# Altium PCB RcMPPT-BMS.PcbDoc (part 1 of 2)
Units mm, origin at the board's own origin, x right, y up, seen from the top; angles counter-clockwise.
Board outline 99.06 x 55.88 mm, 4 copper layers (Top Layer, Mid Layer 1, Mid Layer 2, Bottom Layer), stack 1.587 mm thick; 194 components, 140 nets, 605 pads, 158 vias.
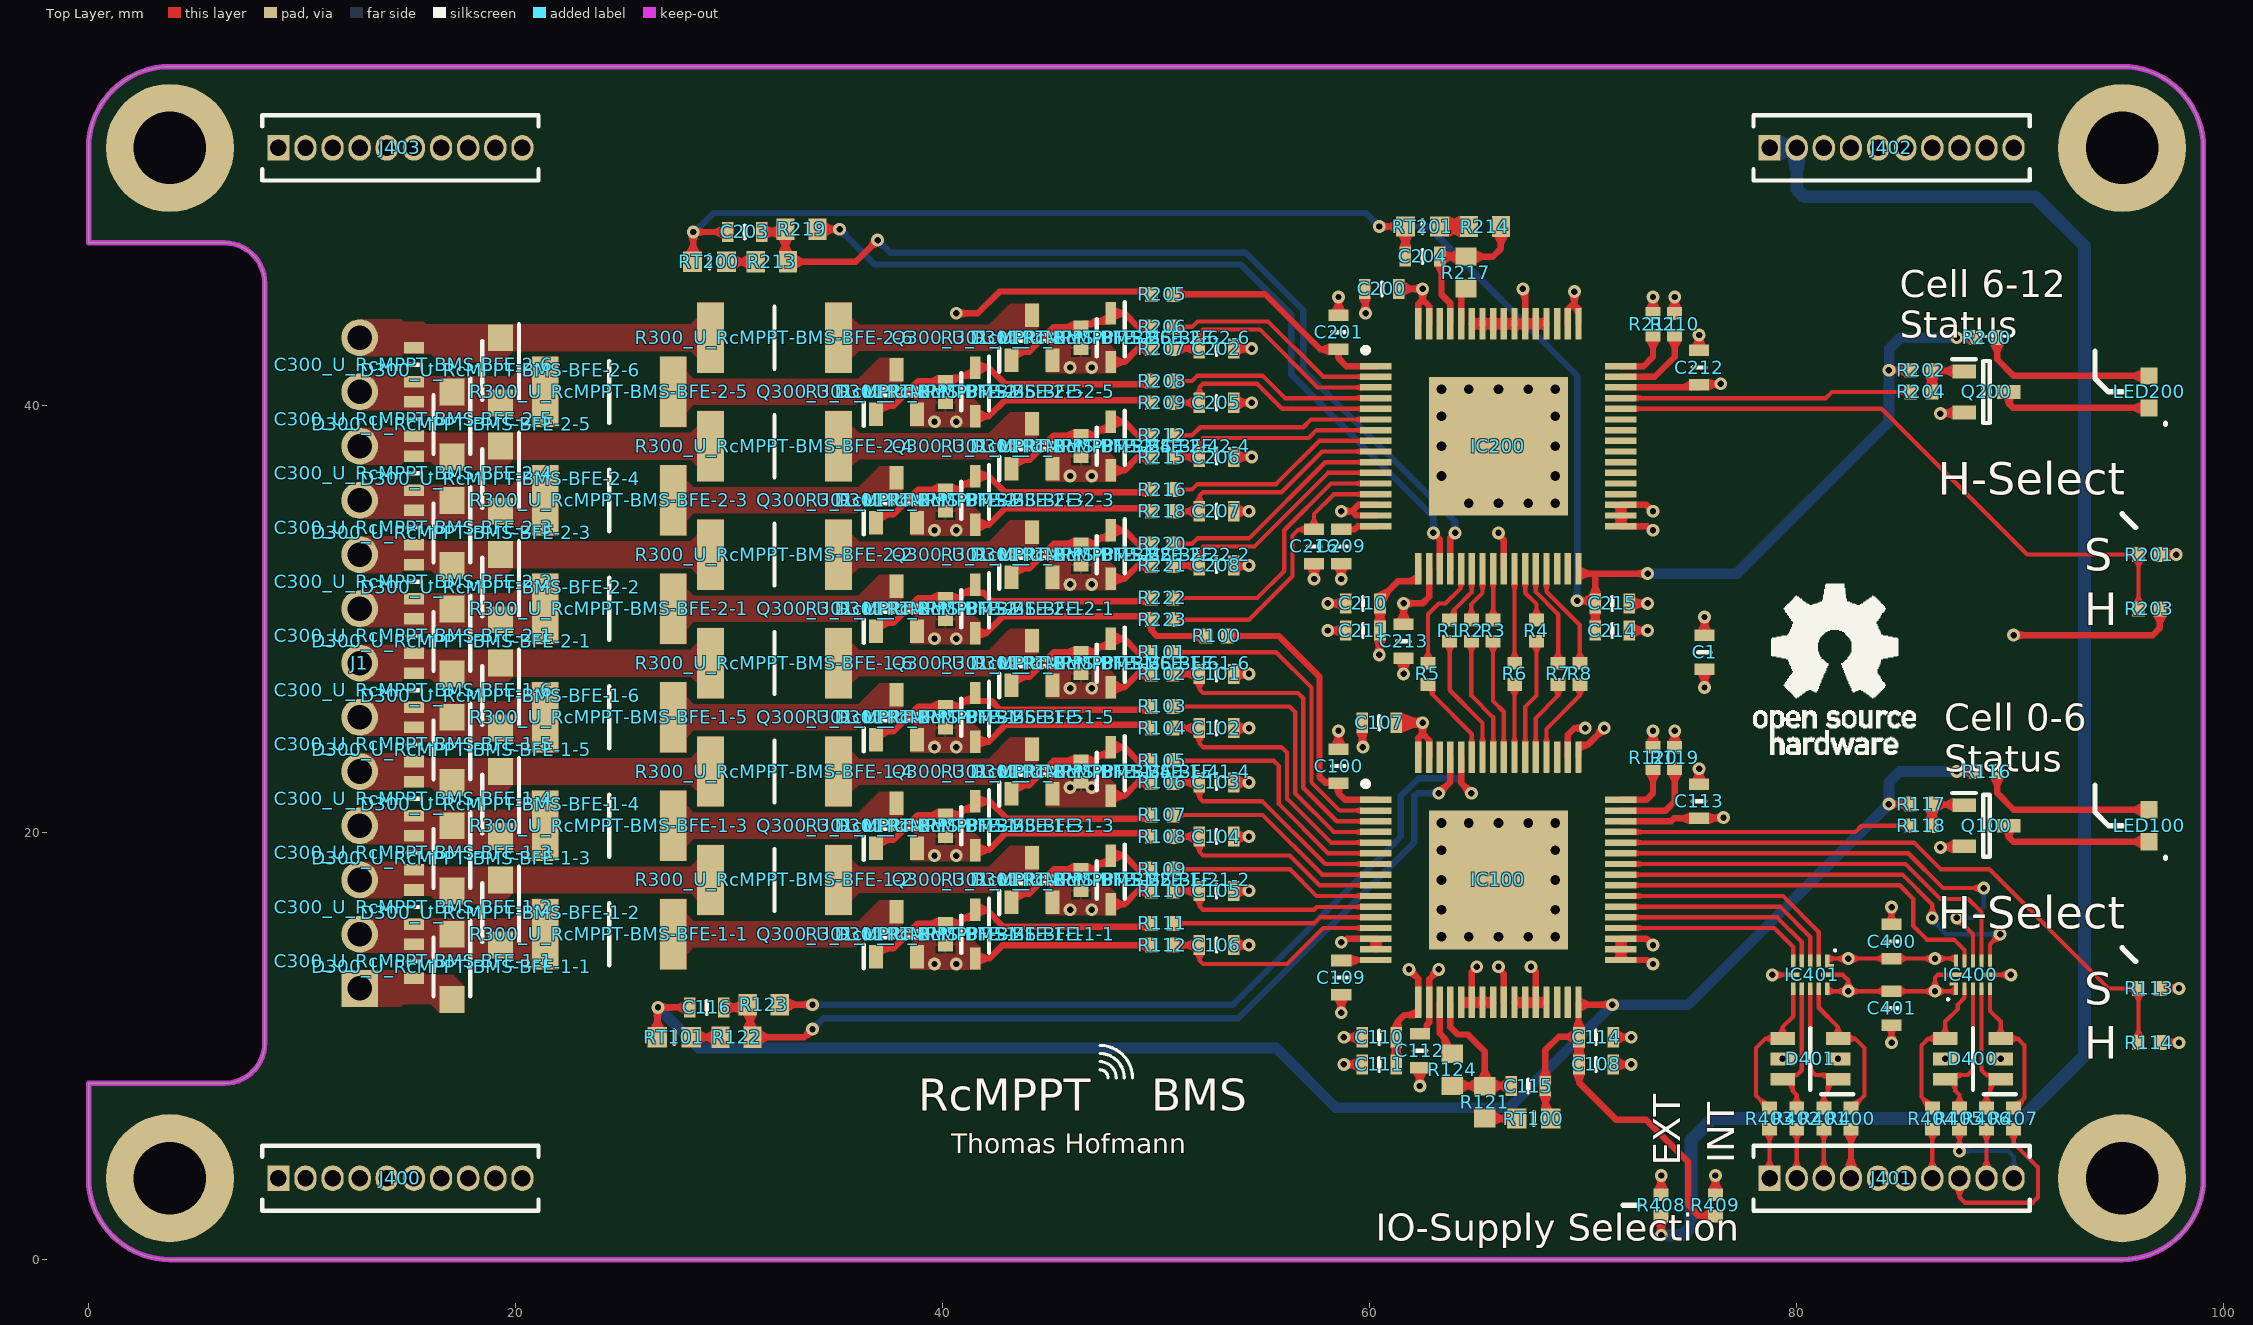
[diagram p0: Top Layer view]
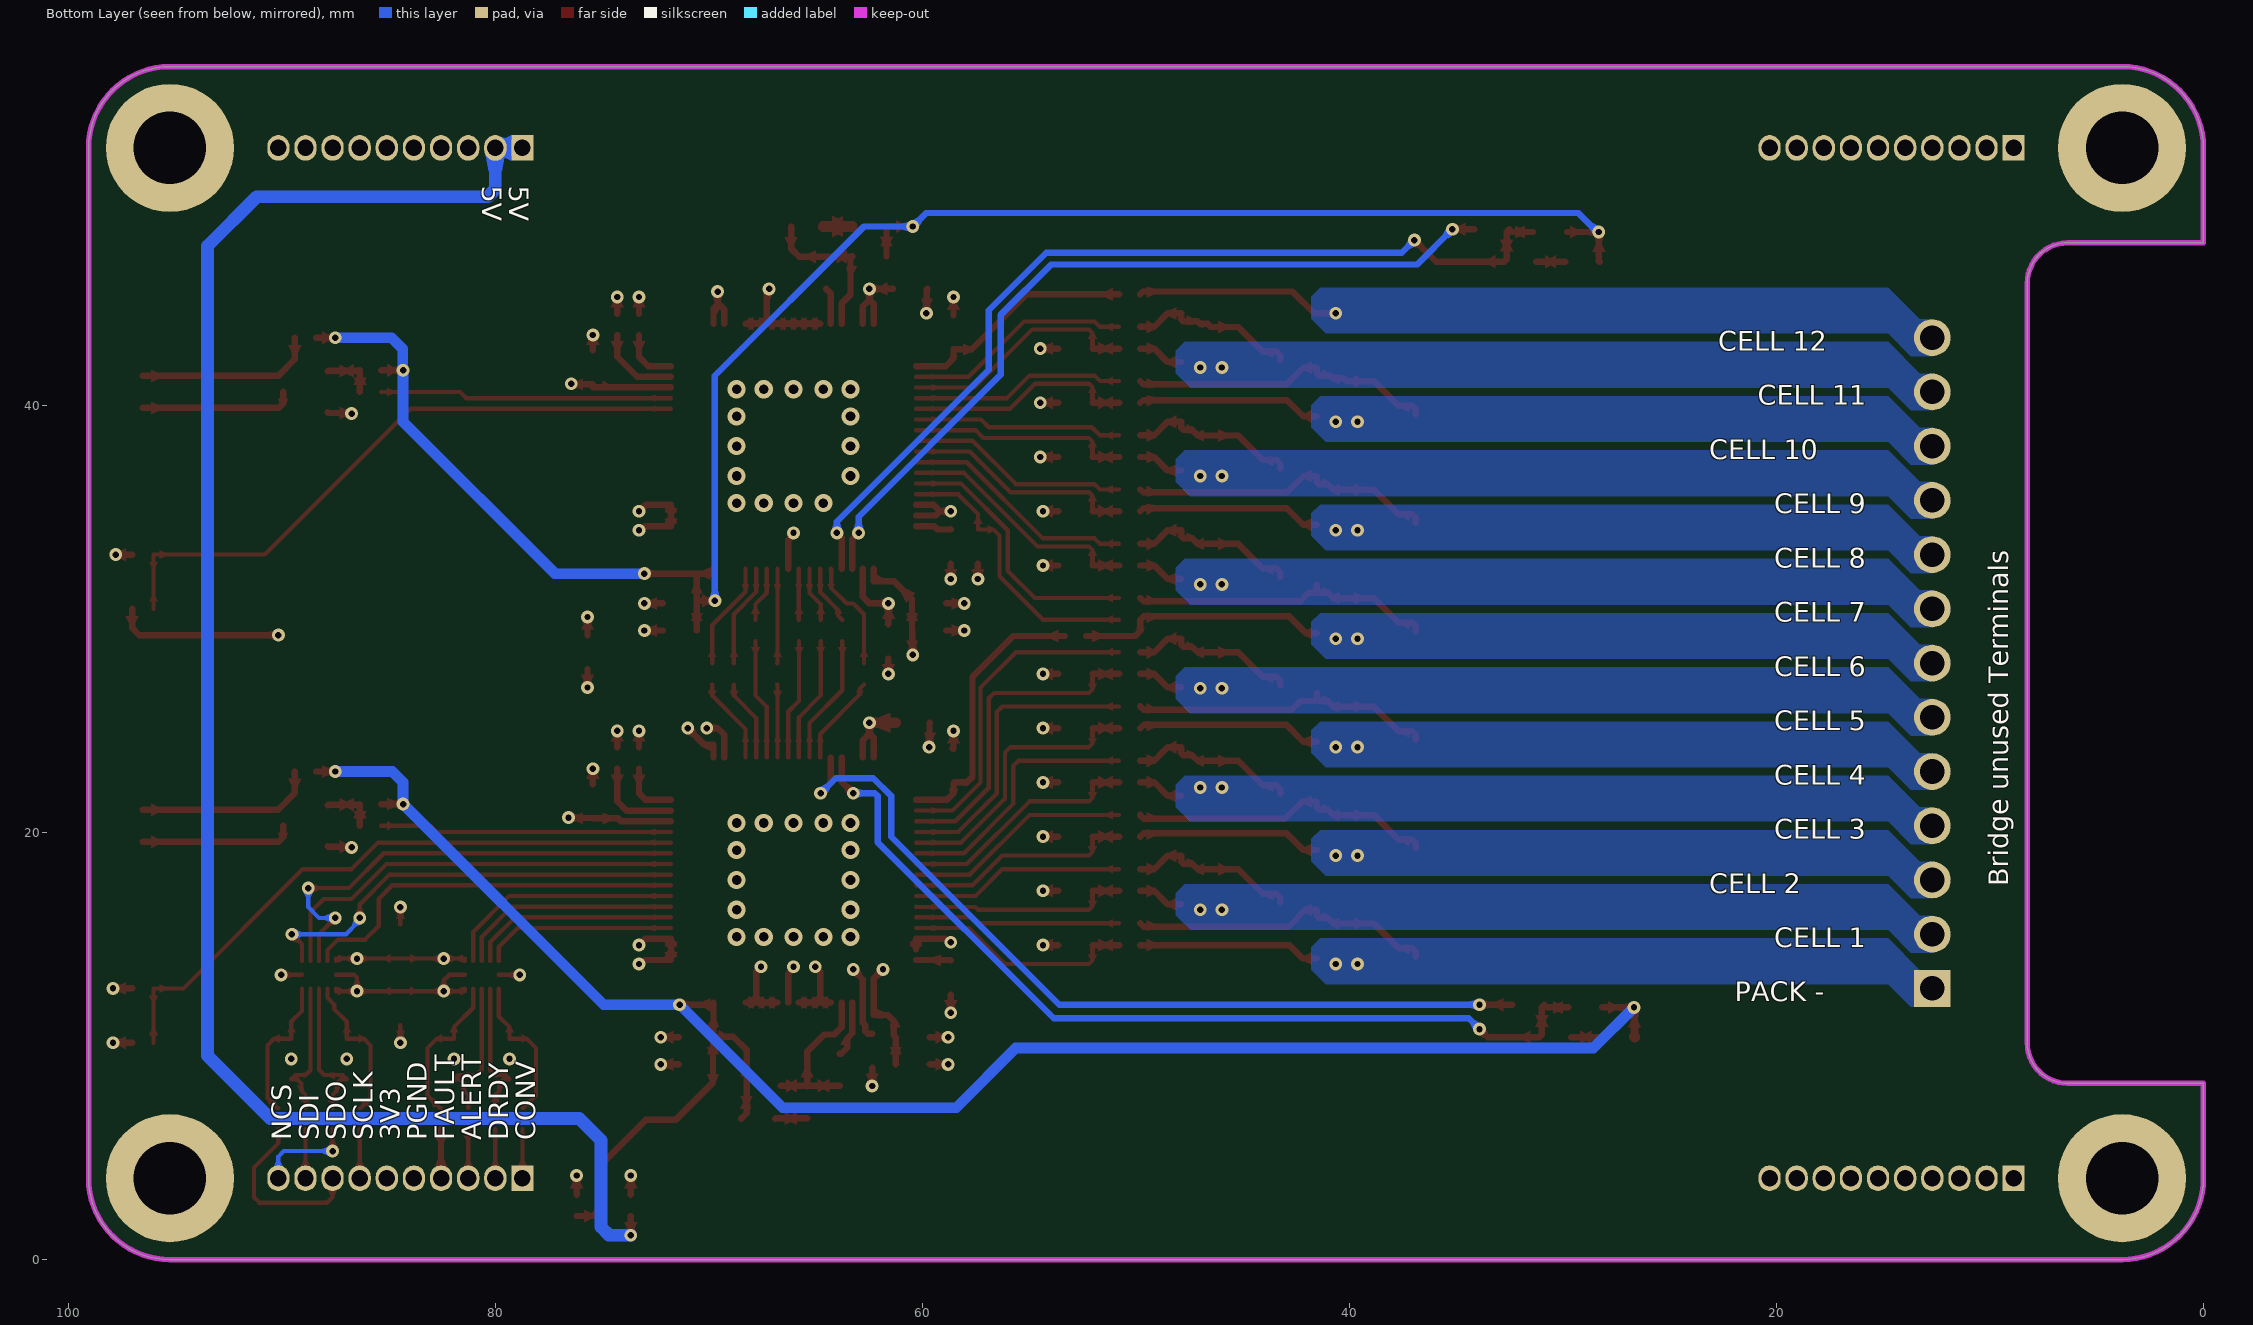
[diagram p1: Bottom Layer view, seen from below]
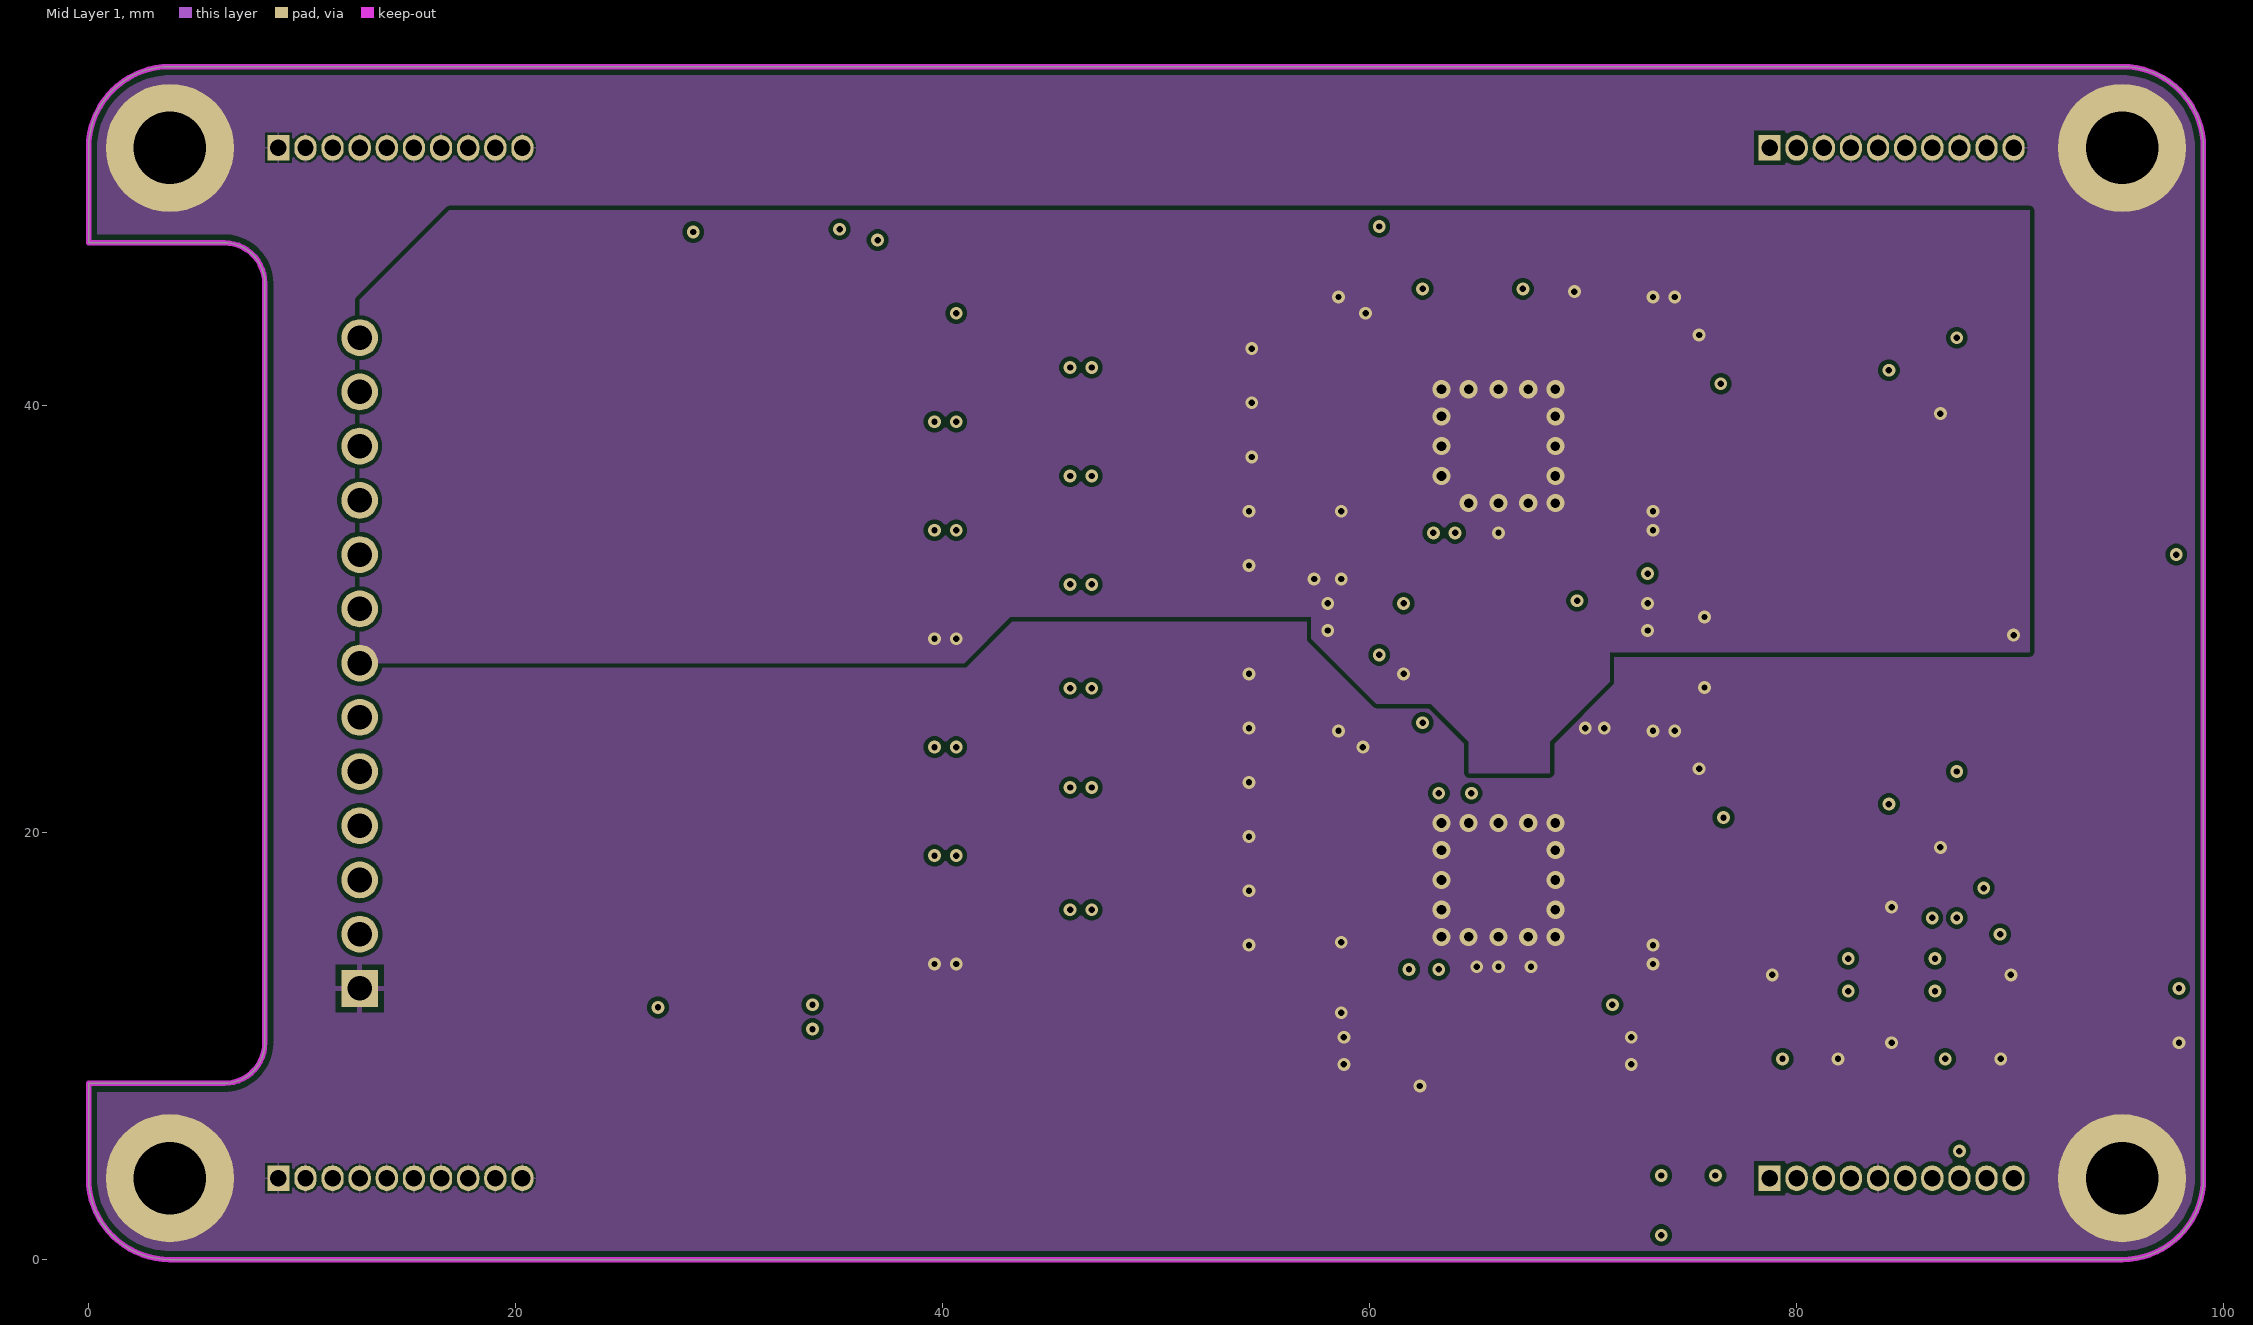
[diagram p2: Mid Layer 1]
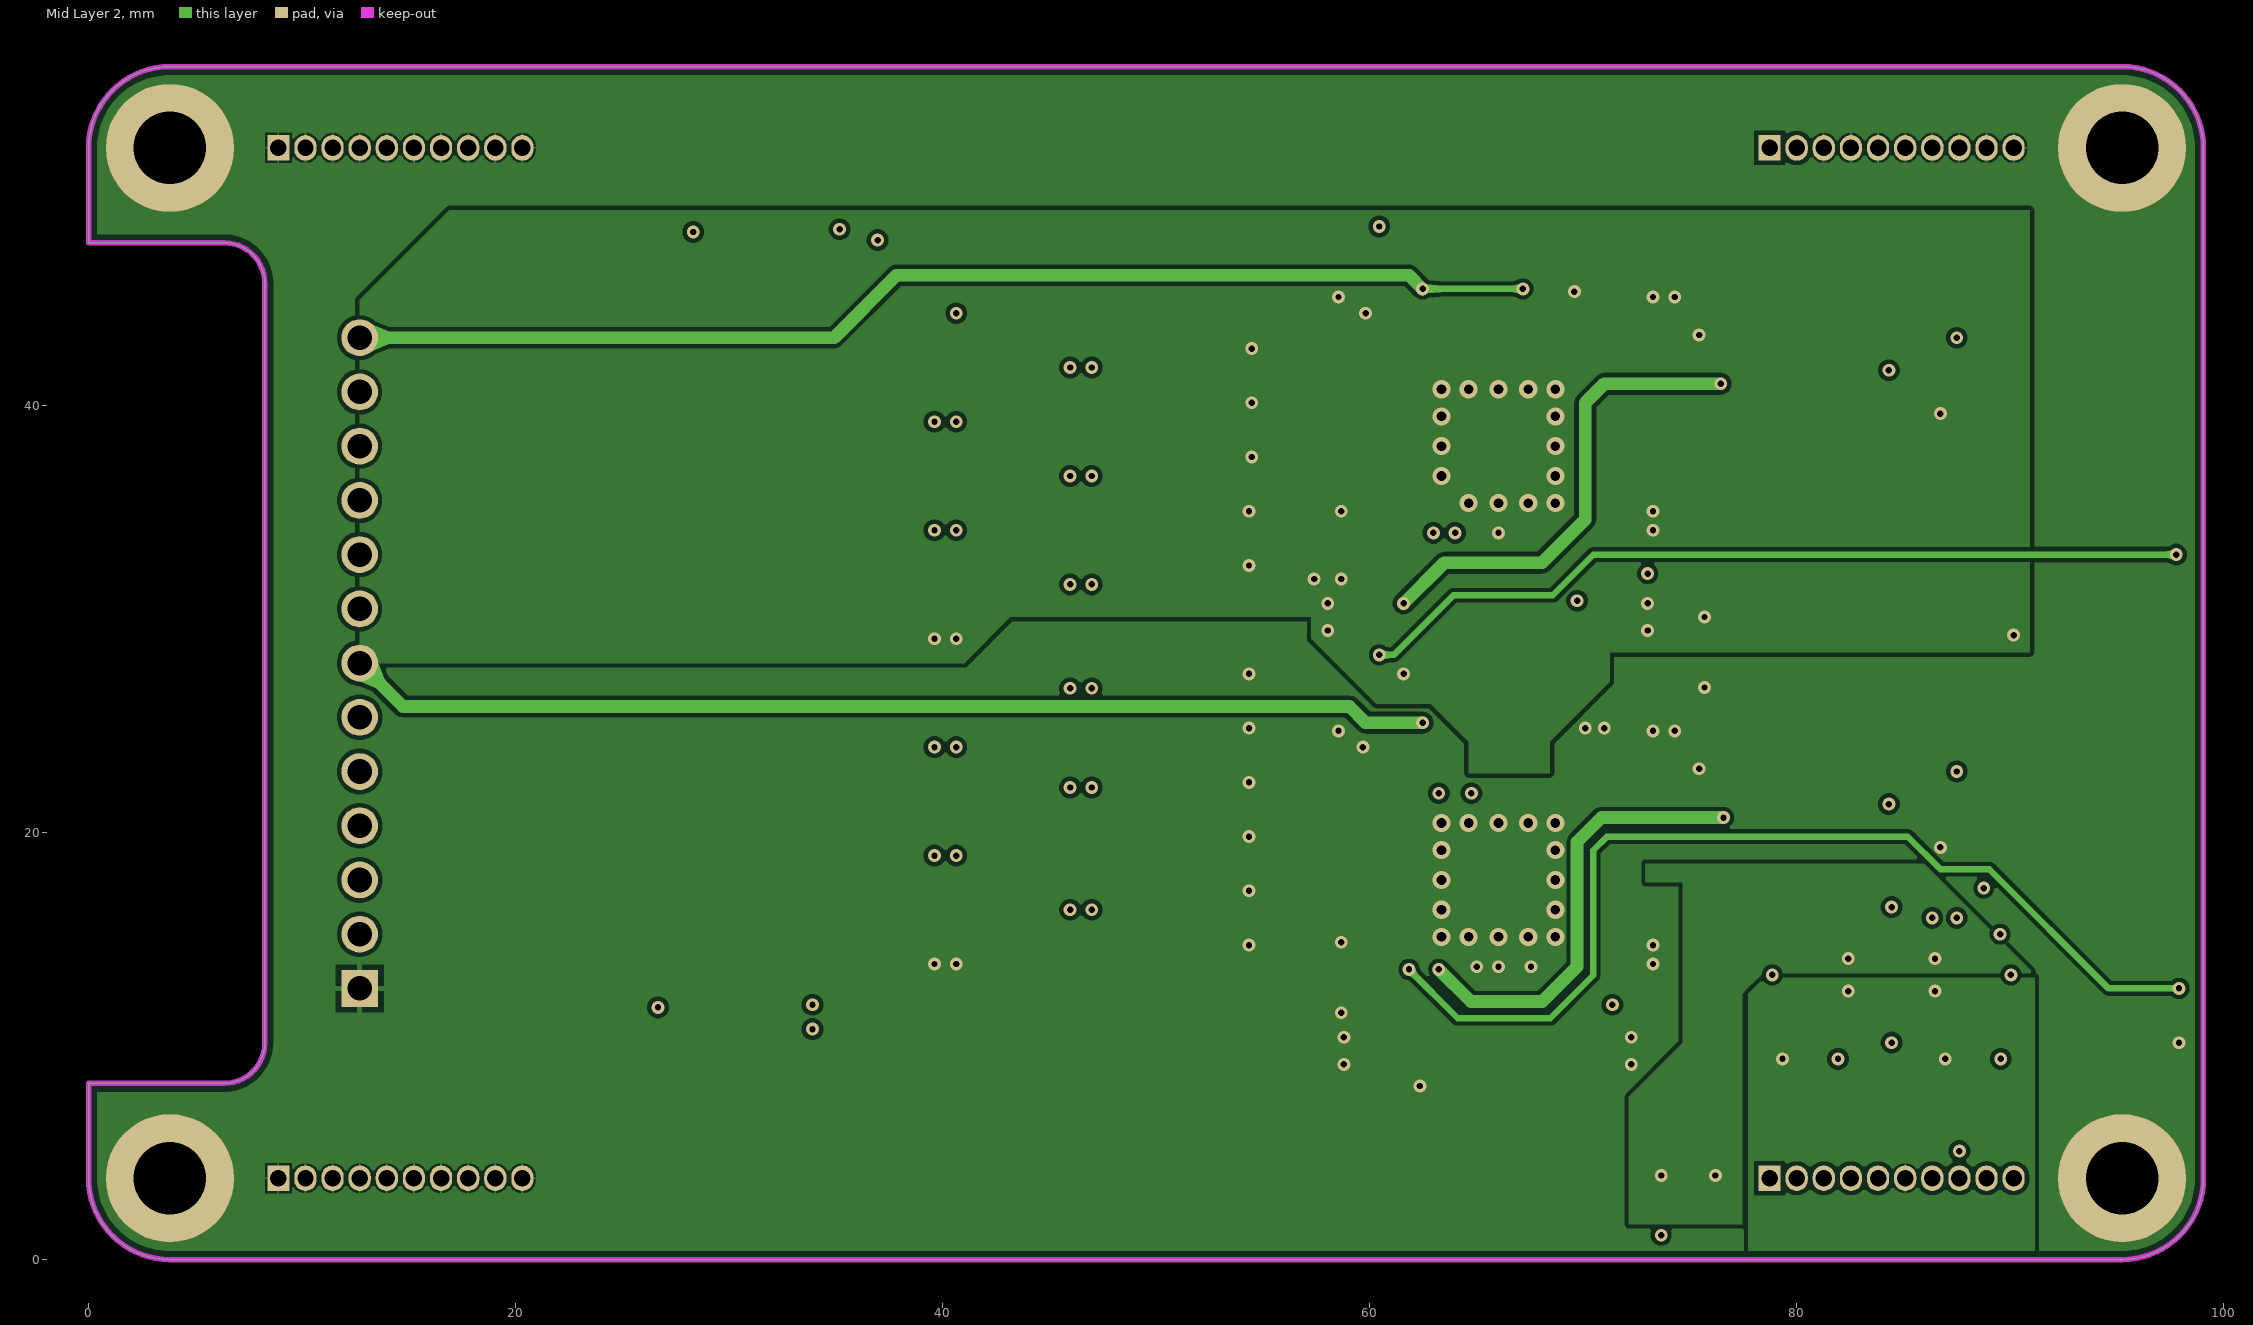
[diagram p3: Mid Layer 2]
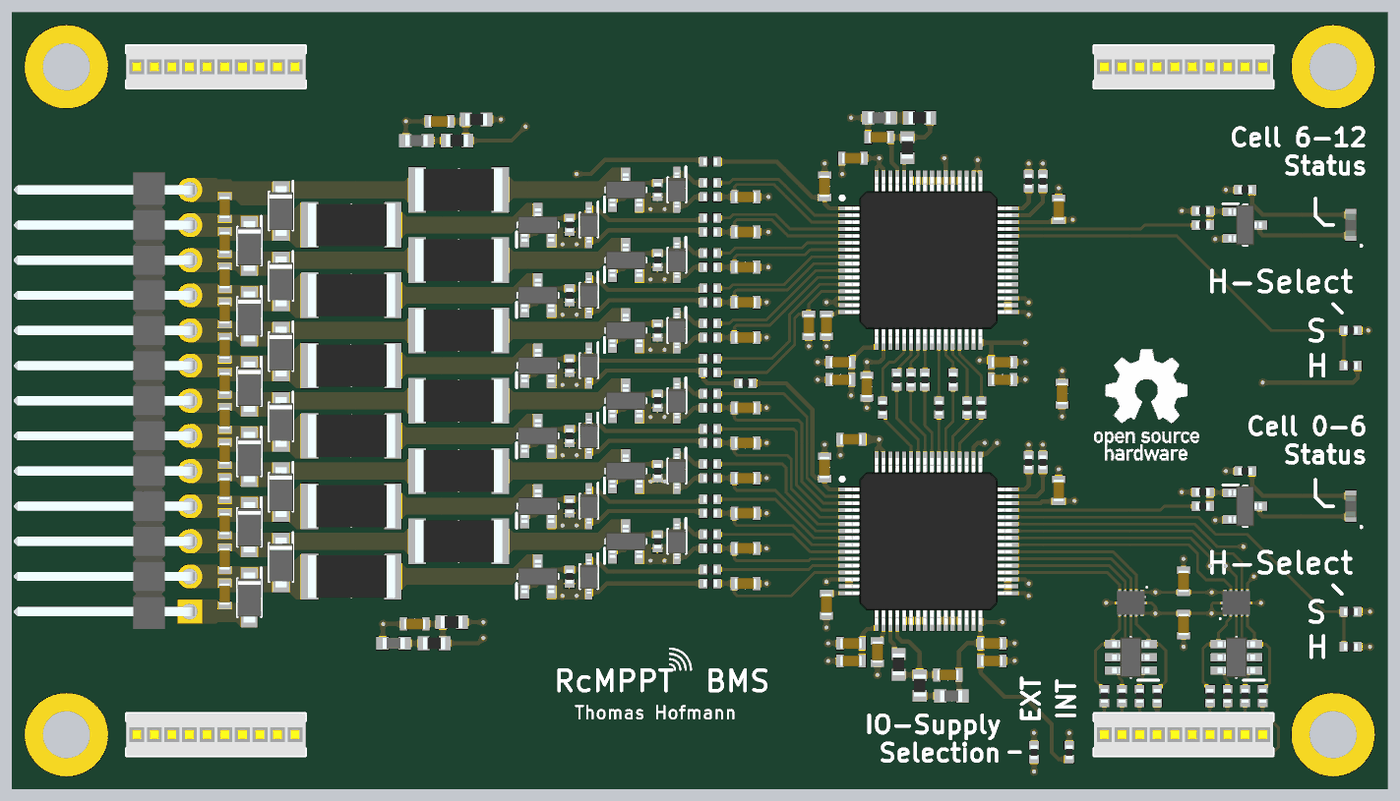
[diagram p5: 3D render of the assembled board from above, using the file's embedded part models]

## Layer stack, top to bottom
Top Solder: solder mask 0.0127, SM-001, Dk 3.8
Top Layer: signal copper 0.035
Dielectric 1: prepreg 0.2083, PP-022, Dk 4.6
Mid Layer 1: signal copper 0.0175
Core: core 1.065, Core-040, Dk 4.6
Mid Layer 2: signal copper 0.0175
Dielectric 2: prepreg 0.2083, PP-022, Dk 4.6
Bottom Layer: signal copper 0.035
Bottom Solder: solder mask 0.0127, SM-001, Dk 3.8

## Board outline
0,3.81 ccw(c3.81,3.81) 3.81,0 95.25,0 ccw(c95.25,3.81) 99.06,3.81 99.06,52.07 ccw(c95.25,52.07) 95.25,55.88 67.31,55.88 31.75,55.88 3.81,55.88 ccw(c3.81,52.07) 0,52.07 0,47.625 6.35,47.625 cw(c6.35,45.72) 8.255,45.72 8.255,10.16 cw(c6.35,10.16) 6.35,8.255 0,8.255

## Design rules (kind name [scope] priority, off if disabled: settings)
AcuteAngle [All] p1: minimum=6.00000000000000E+0001 checktracksonly=FALSE
BoardOutlineClearance [All] p1: gap=0.4 ignorepadtopadclearanceinfootprint=FALSE
Clearance [All] p1: gap=0.2 ignorepadtopadclearanceinfootprint=FALSE except(0.102: Arc-Text Track-Text SMDPad-THPad SMDPad-Text THPad-THPad THPad-Text Fill-Text Poly-Text Region-Text Text-Text; 0.127: Arc-Arc Arc-Track Track-Track SMDPad-SMDPad SMDPad-Via THPad-Via Via-Text; 0.25: Arc-Hole Track-Hole SMDPad-Hole THPad-Hole Via-Hole Fill-Hole Poly-Hole Region-Hole Text-Hole; 0.254: Arc-Via Track-Via Via-Via; 0.33: Arc-THPad Track-THPad)
ComponentClearance [All] p1: gap=0.102 collisioncheckmode=3 verticalgap=0.102 showdistances=TRUE
DiffPairsRouting [InDifferentialPair('USB-MCU.USBD') Or InDifferentialPair('USB-CON')] p1: maxlimit=0.203 minlimit=0.102 mostfreqgap=0.203 toplayer_mingap=0.203 toplayer_minwidth=0.261 toplayer_maxwidth=0.261 toplayer_prefwidth=0.261 midlayer1_minwidth=0.381 midlayer1_maxwidth=0.381 midlayer1_prefwidth=0.381 midlayer2_minwidth=0.381 midlayer2_maxwidth=0.381 midlayer2_prefwidth=0.381 bottomlayer_mingap=0.203 bottomlayer_minwidth=0.261 bottomlayer_maxwidth=0.261 bottomlayer_prefwidth=0.261 impedanceprofiledriven=TRUE impedanceprofileid={FED37976-4A96-4117-917E-B578259A096B} maxuncoupledlength=12.7
Height [All] p1: minheight=0 maxheight=1816.048 prefheight=12.7
HoleSize [All] p1: absolutevalues=TRUE maxlimit=6.3 minlimit=0.3 maxpercent=80.000 minpercent=20.000
HoleToHoleClearance [All] p1: gap=0.5 allowstackedmicrovias=FALSE
MinimumAnnularRing [All] p1: minimumring=0.13
MinimumSolderMaskSliver [All] p1: minsoldermaskwidth=0.1
PlaneClearance [All] p1: clearance=0.102
PlaneConnect PlaneConnectPowerPads [InPadClass('PowerPads')] p1: planeconnectstyle=Direct reliefexpansion=0.508 reliefentries=4 reliefconductorwidth=0.254 reliefairgap=0.254
PlaneConnect [All] p2: pad.planeconnectstyle=Relief pad.reliefexpansion=0.3 pad.reliefentries=4 pad.reliefconductorwidth=0.102 pad.reliefairgap=0.102 via.planeconnectstyle=Direct via.reliefexpansion=0.3 via.reliefentries=4 via.reliefconductorwidth=0.127 via.reliefairgap=0.127
PolygonConnect PolygonConnectPowerPads [All vs (InPadClass('PowerPads'))] p1: connectstyle=Direct reliefconductorwidth=0.254 reliefentries=4 polygonreliefangle="90 Angle" airgapwidth=0.254
PolygonConnect [All] p2: thpad.connectstyle=Relief thpad.reliefconductorwidth=0.102 thpad.reliefentries=4 thpad.polygonreliefangle="90 Angle" thpad.airgapwidth=0.102 smdpad.connectstyle=Relief smdpad.reliefconductorwidth=0.102 smdpad.reliefentries=4 smdpad.polygonreliefangle="90 Angle" smdpad.airgapwidth=0.102 via.connectstyle=Direct via.reliefconductorwidth=0.127 via.reliefentries=4 via.polygonreliefangle="90 Angle" via.airgapwidth=0.127
RoutingVias [All] p1: holewidth=0.3 width=0.6 viastyle="Through Hole" minholewidth=0.2 minwidth=0.4 maxholewidth=10 maxwidth=10
SilkToSilkClearance [All] p1: silktosilkclearance=0
SilkToSolderMaskClearance [IsPad] p1: minsilkscreentomaskgap=0.15 clearancetoexposedcopper=TRUE
SolderMaskExpansion "SolderMaskExpansion Vias" [IsVia] p1: expansion=0.102 istentingtop=TRUE
SolderMaskExpansion [All] p2: expansion=0.05 istentingtop=FALSE
Width [All] p1: maxlimit=50 minlimit=0.102 preferedwidth=0.3 midlayer1_minwidth=0.127 midlayer2_minwidth=0.127 minimp=50.000000 maximp=50.000000 favimp=50.000000
20 further rules are at their usual default settings.

## Classes and differential pairs
component class U_RcMPPT-BMS-BFE-2-6: C300_U_RcMPPT-BMS-BFE-2-6 D300_U_RcMPPT-BMS-BFE-2-6 D301_U_RcMPPT-BMS-BFE-2-6 Q300_U_RcMPPT-BMS-BFE-2-6 R300_U_RcMPPT-BMS-BFE-2-6 R301_U_RcMPPT-BMS-BFE-2-6
component class U_RcMPPT-BMS-BFE-2-5: C300_U_RcMPPT-BMS-BFE-2-5 D300_U_RcMPPT-BMS-BFE-2-5 D301_U_RcMPPT-BMS-BFE-2-5 Q300_U_RcMPPT-BMS-BFE-2-5 R300_U_RcMPPT-BMS-BFE-2-5 R301_U_RcMPPT-BMS-BFE-2-5
component class U_RcMPPT-BMS-BFE-2-4: C300_U_RcMPPT-BMS-BFE-2-4 D300_U_RcMPPT-BMS-BFE-2-4 D301_U_RcMPPT-BMS-BFE-2-4 Q300_U_RcMPPT-BMS-BFE-2-4 R300_U_RcMPPT-BMS-BFE-2-4 R301_U_RcMPPT-BMS-BFE-2-4
component class U_RcMPPT-BMS-BFE-2-3: C300_U_RcMPPT-BMS-BFE-2-3 D300_U_RcMPPT-BMS-BFE-2-3 D301_U_RcMPPT-BMS-BFE-2-3 Q300_U_RcMPPT-BMS-BFE-2-3 R300_U_RcMPPT-BMS-BFE-2-3 R301_U_RcMPPT-BMS-BFE-2-3
component class U_RcMPPT-BMS-BFE-2-2: C300_U_RcMPPT-BMS-BFE-2-2 D300_U_RcMPPT-BMS-BFE-2-2 D301_U_RcMPPT-BMS-BFE-2-2 Q300_U_RcMPPT-BMS-BFE-2-2 R300_U_RcMPPT-BMS-BFE-2-2 R301_U_RcMPPT-BMS-BFE-2-2
component class U_RcMPPT-BMS-BFE-2-1: C300_U_RcMPPT-BMS-BFE-2-1 D300_U_RcMPPT-BMS-BFE-2-1 D301_U_RcMPPT-BMS-BFE-2-1 Q300_U_RcMPPT-BMS-BFE-2-1 R300_U_RcMPPT-BMS-BFE-2-1 R301_U_RcMPPT-BMS-BFE-2-1
component class U_RcMPPT-BMS-BFE-1-4: C300_U_RcMPPT-BMS-BFE-1-4 D300_U_RcMPPT-BMS-BFE-1-4 D301_U_RcMPPT-BMS-BFE-1-4 Q300_U_RcMPPT-BMS-BFE-1-4 R300_U_RcMPPT-BMS-BFE-1-4 R301_U_RcMPPT-BMS-BFE-1-4
component class U_RcMPPT-BMS-BFE-1-3: C300_U_RcMPPT-BMS-BFE-1-3 D300_U_RcMPPT-BMS-BFE-1-3 D301_U_RcMPPT-BMS-BFE-1-3 Q300_U_RcMPPT-BMS-BFE-1-3 R300_U_RcMPPT-BMS-BFE-1-3 R301_U_RcMPPT-BMS-BFE-1-3
component class U_RcMPPT-BMS-BFE-1-2: C300_U_RcMPPT-BMS-BFE-1-2 D300_U_RcMPPT-BMS-BFE-1-2 D301_U_RcMPPT-BMS-BFE-1-2 Q300_U_RcMPPT-BMS-BFE-1-2 R300_U_RcMPPT-BMS-BFE-1-2 R301_U_RcMPPT-BMS-BFE-1-2
component class U_RcMPPT-BMS-BFE-1-1: C300_U_RcMPPT-BMS-BFE-1-1 D300_U_RcMPPT-BMS-BFE-1-1 D301_U_RcMPPT-BMS-BFE-1-1 Q300_U_RcMPPT-BMS-BFE-1-1 R300_U_RcMPPT-BMS-BFE-1-1 R301_U_RcMPPT-BMS-BFE-1-1
channel class RcMPPT-BMS-BFE: U_RcMPPT-BMS-BFE-1-5 U_RcMPPT-BMS-BFE-1-6
component class IO: C400 C401 D400 D401 IC400 IC401 J400 J401 J402 J403 R400 R401 R402 R403 R404 R405 R406 R407 R408 R409
component class BMS-AFE1: C100 C101 C102 C103 C104 C105 C106 C107 C108 C109 C110 C111 C112 C113 C114 C115 C116 IC100 LED100 Q100 R100 R101 R102 R103 R104 R105 R106 R107 R108 R109 R110 R111 R112 R113 R114 R116 R117 R118 R119 R120 R121 R122 R123 R124 RT100 RT101
component class U_RcMPPT-BMS-BFE-1-6: C300_U_RcMPPT-BMS-BFE-1-6 D300_U_RcMPPT-BMS-BFE-1-6 D301_U_RcMPPT-BMS-BFE-1-6 Q300_U_RcMPPT-BMS-BFE-1-6 R300_U_RcMPPT-BMS-BFE-1-6 R301_U_RcMPPT-BMS-BFE-1-6
component class U_RcMPPT-BMS-BFE-1-5: C300_U_RcMPPT-BMS-BFE-1-5 D300_U_RcMPPT-BMS-BFE-1-5 D301_U_RcMPPT-BMS-BFE-1-5 Q300_U_RcMPPT-BMS-BFE-1-5 R300_U_RcMPPT-BMS-BFE-1-5 R301_U_RcMPPT-BMS-BFE-1-5
component class BMS-AFE2: C200 C201 C202 C203 C204 C205 C206 C207 C208 C209 C210 C211 C212 C213 C214 C215 C216 IC200 LED200 Q200 R200 R201 R202 R203 R204 R205 R206 R207 R208 R209 R210 R211 R212 R213 R214 R215 R216 R217 R218 R219 R220 R221 R222 R223 RT200 RT201
component class RcMPPT-Top: C1 J1 R1 R2 R3 R4 R5 R6 R7 R8

## Components (designator, comment, footprint, x,y, rotation, side; value= is the part's Value field where it differs from the comment)
C1 "100nF 50V" CAPC1608X97N 75.692,28.448 r90 top
C100 "100nF 50V" CAPC1608X97N 58.547,23.114 r270 top
C101 "100nF 50V" CAPC1608X97N 52.832,27.432 r180 top locked
C102 "100nF 50V" CAPC1608X97N 52.832,24.892 r180 top locked
C103 "100nF 50V" CAPC1608X97N 52.832,22.352 r180 top locked
C104 "100nF 50V" CAPC1608X97N 52.832,19.812 r180 top locked
C105 "100nF 50V" CAPC1608X97N 52.832,17.272 r180 top locked
C106 "100nF 50V" CAPC1608X97N 52.832,14.732 r180 top locked
C107 "100nF 50V" CAPC1608X97N 60.452,25.146 r0 top
C108 "2.2uF 10V" CAPC1608X97N 70.612,9.144 r180 top
C109 "2.2uF 10V" CAPC1608X97N 58.674,13.208 r90 top
C110 "2.2uF 10V" CAPC1608X97N 60.452,10.414 r0 top
C111 "100nF 50V" CAPC1608X97N 60.452,9.144 r0 top
C112 "2.2uF 10V" CAPC1608X97N 62.357,9.779 r90 top
C113 "100nF 50V" CAPC1608X97N 75.438,21.463 r270 top
C114 "2.2uF 10V" CAPC1608X97N 70.612,10.414 r180 top
C115 "47nF 16V" CAPC1608X97N 67.437,8.128 r0 top
C116 "47nF 16V" CAPC1608X97N 28.956,11.811 r180 top
C200 "100nF 50V" CAPC1608X97N 60.579,45.466 r0 top
C201 "100nF 50V" CAPC1608X97N 58.547,43.434 r270 top
C202 "100nF 50V" CAPC1608X97N 52.832,42.672 r180 top locked
C203 "47nF 16V" CAPC1608X97N 30.734,48.133 r180 top
C204 "47nF 16V" CAPC1608X97N 62.484,46.99 r180 top
C205 "100nF 50V" CAPC1608X97N 52.832,40.132 r180 top locked
C206 "100nF 50V" CAPC1608X97N 52.832,37.592 r180 top locked
C207 "100nF 50V" CAPC1608X97N 52.832,35.052 r180 top locked
C208 "100nF 50V" CAPC1608X97N 52.832,32.512 r180 top locked
C209 "2.2uF 10V" CAPC1608X97N 58.674,33.401 r90 top
C210 "2.2uF 10V" CAPC1608X97N 59.69,30.734 r0 top
C211 "100nF 50V" CAPC1608X97N 59.69,29.464 r0 top
C212 "2.2uF 10V" CAPC1608X97N 75.438,41.783 r270 top
C213 "100nF 50V" CAPC1608X97N 61.595,28.956 r90 top
C214 "2.2uF 10V" CAPC1608X97N 71.374,29.464 r180 top
C215 "2.2uF 10V" CAPC1608X97N 71.374,30.734 r180 top
C216 "100nF 50V" CAPC1608X97N 57.404,33.401 r90 top
C300_U_RcMPPT-BMS-BFE-1-1 "100nF 50V" CAPC1608X97N 15.24,13.97 r90 top locked (schematic designator C300)
C300_U_RcMPPT-BMS-BFE-1-2 "100nF 50V" CAPC1608X97N 15.24,16.51 r90 top locked (schematic designator C300)
C300_U_RcMPPT-BMS-BFE-1-3 "100nF 50V" CAPC1608X97N 15.24,19.05 r90 top locked (schematic designator C300)
C300_U_RcMPPT-BMS-BFE-1-4 "100nF 50V" CAPC1608X97N 15.24,21.59 r90 top locked (schematic designator C300)
C300_U_RcMPPT-BMS-BFE-1-5 "100nF 50V" CAPC1608X97N 15.24,24.13 r90 top locked (schematic designator C300)
C300_U_RcMPPT-BMS-BFE-1-6 "100nF 50V" CAPC1608X97N 15.24,26.67 r90 top locked (schematic designator C300)
C300_U_RcMPPT-BMS-BFE-2-1 "100nF 50V" CAPC1608X97N 15.24,29.21 r90 top locked (schematic designator C300)
C300_U_RcMPPT-BMS-BFE-2-2 "100nF 50V" CAPC1608X97N 15.24,31.75 r90 top locked (schematic designator C300)
C300_U_RcMPPT-BMS-BFE-2-3 "100nF 50V" CAPC1608X97N 15.24,34.29 r90 top locked (schematic designator C300)
C300_U_RcMPPT-BMS-BFE-2-4 "100nF 50V" CAPC1608X97N 15.24,36.83 r90 top locked (schematic designator C300)
C300_U_RcMPPT-BMS-BFE-2-5 "100nF 50V" CAPC1608X97N 15.24,39.37 r90 top locked (schematic designator C300)
C300_U_RcMPPT-BMS-BFE-2-6 "100nF 50V" CAPC1608X97N 15.24,41.91 r90 top locked (schematic designator C300)
C400 "100nF 6.3V" CAPC1608X97N 84.455,14.897 r270 top
C401 "100nF 6.3V" CAPC1608X97N 84.455,11.773 r90 top
D300_U_RcMPPT-BMS-BFE-1-1 "5.6V 400mW" SOD-123FL 17.018,13.715 r270 top locked (schematic designator D300)
D300_U_RcMPPT-BMS-BFE-1-2 "5.6V 400mW" SOD-123FL 19.304,16.255 r270 top locked (schematic designator D300)
D300_U_RcMPPT-BMS-BFE-1-3 "5.6V 400mW" SOD-123FL 17.018,18.795 r270 top locked (schematic designator D300)
D300_U_RcMPPT-BMS-BFE-1-4 "5.6V 400mW" SOD-123FL 19.304,21.335 r270 top locked (schematic designator D300)
D300_U_RcMPPT-BMS-BFE-1-5 "5.6V 400mW" SOD-123FL 17.018,23.875 r270 top locked (schematic designator D300)
D300_U_RcMPPT-BMS-BFE-1-6 "5.6V 400mW" SOD-123FL 19.304,26.416 r270 top locked (schematic designator D300)
D300_U_RcMPPT-BMS-BFE-2-1 "5.6V 400mW" SOD-123FL 17.018,28.955 r270 top locked (schematic designator D300)
D300_U_RcMPPT-BMS-BFE-2-2 "5.6V 400mW" SOD-123FL 19.304,31.495 r270 top locked (schematic designator D300)
D300_U_RcMPPT-BMS-BFE-2-3 "5.6V 400mW" SOD-123FL 17.018,34.035 r270 top locked (schematic designator D300)
D300_U_RcMPPT-BMS-BFE-2-4 "5.6V 400mW" SOD-123FL 19.304,36.575 r270 top locked (schematic designator D300)
D300_U_RcMPPT-BMS-BFE-2-5 "5.6V 400mW" SOD-123FL 17.018,39.115 r270 top locked (schematic designator D300)
D300_U_RcMPPT-BMS-BFE-2-6 "5.6V 400mW" SOD-123FL 19.304,41.655 r270 top locked (schematic designator D300)
D301_U_RcMPPT-BMS-BFE-1-1 "5.1V 200mW" SOD-323 41.529,15.24 r270 top locked (schematic designator D301)
D301_U_RcMPPT-BMS-BFE-1-2 "5.1V 200mW" SOD-323 47.879,17.78 r270 top locked (schematic designator D301)
D301_U_RcMPPT-BMS-BFE-1-3 "5.1V 200mW" SOD-323 41.529,20.32 r270 top locked (schematic designator D301)
D301_U_RcMPPT-BMS-BFE-1-4 "5.1V 200mW" SOD-323 47.879,22.86 r270 top locked (schematic designator D301)
D301_U_RcMPPT-BMS-BFE-1-5 "5.1V 200mW" SOD-323 41.529,25.4 r270 top locked (schematic designator D301)
D301_U_RcMPPT-BMS-BFE-1-6 "5.1V 200mW" SOD-323 47.879,27.94 r270 top locked (schematic designator D301)
D301_U_RcMPPT-BMS-BFE-2-1 "5.1V 200mW" SOD-323 41.529,30.48 r270 top locked (schematic designator D301)
D301_U_RcMPPT-BMS-BFE-2-2 "5.1V 200mW" SOD-323 47.879,33.02 r270 top locked (schematic designator D301)
D301_U_RcMPPT-BMS-BFE-2-3 "5.1V 200mW" SOD-323 41.529,35.56 r270 top locked (schematic designator D301)
D301_U_RcMPPT-BMS-BFE-2-4 "5.1V 200mW" SOD-323 47.879,38.1 r270 top locked (schematic designator D301)
D301_U_RcMPPT-BMS-BFE-2-5 "5.1V 200mW" SOD-323 41.529,40.64 r270 top locked (schematic designator D301)
D301_U_RcMPPT-BMS-BFE-2-6 "5.1V 200mW" SOD-323 47.879,43.18 r270 top locked (schematic designator D301)
D400 "ESDSUPPRESSOR" SOT23-6 88.265,9.398 r180 top
D401 "ESDSUPPRESSOR" SOT23-6 80.645,9.398 r180 top
IC100 "BQ76PL536APAPT" QFP50P1200X1200X120-65N 66.04,17.78 r0 top locked
IC200 "BQ76PL536APAPT" QFP50P1200X1200X120-65N 66.04,38.1 r0 top locked
IC400 "TXU0304RUTR" UQFN-12 88.265,13.335 r0 top
IC401 "TXU0304RUTR" UQFN-12 80.645,13.335 r180 top
J1 "22-28-8133" HDRRA13W66P0X254_1X13_3302X229X249P 12.7,12.7 r90 top locked
J400 "SMS-110-01-G-S" SAMTEC_SMS-110-X-X-S 14.605,3.81 r0 top locked
J401 "SMS-110-01-G-S" SAMTEC_SMS-110-X-X-S 84.455,3.81 r0 top locked
J402 "SMS-110-01-G-S" SAMTEC_SMS-110-X-X-S 84.455,52.07 r0 top locked
J403 "SMS-110-01-G-S" SAMTEC_SMS-110-X-X-S 14.605,52.07 r0 top locked
LED100 "Green" CHIPLED_0603 96.52,20.32 r90 top
LED200 "Green" CHIPLED_0603 96.52,40.64 r90 top
Q100 "60V 2A" SOT96P240X110-3N 88.9,20.32 r0 top
Q200 "60V 2A" SOT96P240X110-3N 88.9,40.64 r0 top
Q300_U_RcMPPT-BMS-BFE-1-1 "60V 2A" SOT96P240X110-3N 37.846,15.24 r90 top locked (schematic designator Q300)
Q300_U_RcMPPT-BMS-BFE-1-2 "60V 2A" SOT96P240X110-3N 44.196,17.78 r90 top locked (schematic designator Q300)
Q300_U_RcMPPT-BMS-BFE-1-3 "60V 2A" SOT96P240X110-3N 37.846,20.32 r90 top locked (schematic designator Q300)
Q300_U_RcMPPT-BMS-BFE-1-4 "60V 2A" SOT96P240X110-3N 44.196,22.86 r90 top locked (schematic designator Q300)
Q300_U_RcMPPT-BMS-BFE-1-5 "60V 2A" SOT96P240X110-3N 37.846,25.4 r90 top locked (schematic designator Q300)
Q300_U_RcMPPT-BMS-BFE-1-6 "60V 2A" SOT96P240X110-3N 44.196,27.94 r90 top locked (schematic designator Q300)
Q300_U_RcMPPT-BMS-BFE-2-1 "60V 2A" SOT96P240X110-3N 37.846,30.48 r90 top locked (schematic designator Q300)
Q300_U_RcMPPT-BMS-BFE-2-2 "60V 2A" SOT96P240X110-3N 44.196,33.02 r90 top locked (schematic designator Q300)
Q300_U_RcMPPT-BMS-BFE-2-3 "60V 2A" SOT96P240X110-3N 37.846,35.56 r90 top locked (schematic designator Q300)
Q300_U_RcMPPT-BMS-BFE-2-4 "60V 2A" SOT96P240X110-3N 44.196,38.1 r90 top locked (schematic designator Q300)
Q300_U_RcMPPT-BMS-BFE-2-5 "60V 2A" SOT96P240X110-3N 37.846,40.64 r90 top locked (schematic designator Q300)
Q300_U_RcMPPT-BMS-BFE-2-6 "60V 2A" SOT96P240X110-3N 44.196,43.18 r90 top locked (schematic designator Q300)
R1 "1k" RESC1005X40N 63.754,29.464 r90 top
R2 "1k" RESC1005X40N 64.77,29.464 r90 top
R3 "1k" RESC1005X40N 65.786,29.464 r90 top
R4 "1k" RESC1005X40N 67.818,29.464 r90 top
R5 "1k" RESC1005X40N 62.738,27.432 r90 top
R6 "1k" RESC1005X40N 66.802,27.432 r90 top
R7 "1k" RESC1005X40N 68.834,27.432 r90 top
R8 "1k" RESC1005X40N 69.85,27.432 r90 top
R100 "1k" RESC1005X40N 52.84,29.21 r0 top locked
R101 "1k" RESC1005X40N 50.292,28.448 r0 top locked
R102 "1k" RESC1005X40N 50.292,27.432 r0 top locked
R103 "1k" RESC1005X40N 50.292,25.908 r0 top locked
R104 "1k" RESC1005X40N 50.292,24.892 r0 top locked
R105 "1k" RESC1005X40N 50.292,23.368 r0 top locked
R106 "1k" RESC1005X40N 50.292,22.352 r0 top locked
R107 "1k" RESC1005X40N 50.292,20.828 r0 top locked
R108 "1k" RESC1005X40N 50.292,19.812 r0 top locked
R109 "1k" RESC1005X40N 50.292,18.288 r0 top locked
R110 "1k" RESC1005X40N 50.292,17.272 r0 top locked
R111 "1k" RESC1005X40N 50.292,15.748 r0 top locked
R112 "1k" RESC1005X40N 50.292,14.732 r0 top locked
R113 "100k" RESC1005X40N 96.52,12.7 r0 top
R114 "0R" RESC1005X40N 96.52,10.16 r0 top
R116 "2k2" RESC1005X40N 88.9,22.86 r180 top
R117 "100k" RESC1005X40N 85.852,21.336 r180 top
R118 "100R" RESC1005X40N 85.852,20.32 r180 top
R119 "100R" RESC1005X40N 74.295,23.495 r90 top
R120 "100R" RESC1005X40N 73.279,23.495 r90 top
R121 "1.47k 1%" RESC1608X50N 65.405,7.366 r270 top
R122 "1.47k 1%" RESC1608X50N 30.353,10.414 r180 top
R123 "1.82k 1%" RESC1608X50N 31.623,11.938 r180 top
R124 "1.82k 1%" RESC1608X50N 63.881,8.89 r270 top
R200 "2k2" RESC1005X40N 88.9,43.18 r180 top
R201 "100k" RESC1005X40N 96.52,33.02 r0 top
R202 "100k" RESC1005X40N 85.852,41.656 r180 top
R203 "0R" RESC1005X40N 96.52,30.48 r0 top
R204 "100R" RESC1005X40N 85.852,40.64 r180 top
R205 "1k" RESC1005X40N 50.292,45.212 r0 top locked
R206 "1k" RESC1005X40N 50.292,43.688 r0 top locked
R207 "1k" RESC1005X40N 50.292,42.672 r0 top locked
R208 "1k" RESC1005X40N 50.292,41.148 r0 top locked
R209 "1k" RESC1005X40N 50.292,40.132 r0 top locked
R210 "100R" RESC1005X40N 74.295,43.807 r90 top
R211 "100R" RESC1005X40N 73.279,43.807 r90 top
R212 "1k" RESC1005X40N 50.292,38.608 r0 top locked
R213 "1.47k 1%" RESC1608X50N 32.004,46.736 r180 top
R214 "1.47k 1%" RESC1608X50N 65.405,48.387 r180 top
R215 "1k" RESC1005X40N 50.292,37.592 r0 top locked
R216 "1k" RESC1005X40N 50.292,36.068 r0 top locked
R217 "1.82k 1%" RESC1608X50N 64.516,46.228 r90 top
R218 "1k" RESC1005X40N 50.292,35.052 r0 top locked
R219 "1.82k 1%" RESC1608X50N 33.401,48.26 r180 top
R220 "1k" RESC1005X40N 50.292,33.528 r0 top locked
R221 "1k" RESC1005X40N 50.292,32.512 r0 top locked
R222 "1k" RESC1005X40N 50.292,30.988 r0 top locked
R223 "1k" RESC1005X40N 50.292,29.972 r0 top locked
R300_U_RcMPPT-BMS-BFE-1-1 "10R 1W" RESC6331X75N 24.384,15.24 r180 top locked (schematic designator R300)
R300_U_RcMPPT-BMS-BFE-1-2 "10R 1W" RESC6331X75N 32.131,17.78 r180 top locked (schematic designator R300)
R300_U_RcMPPT-BMS-BFE-1-3 "10R 1W" RESC6331X75N 24.384,20.32 r180 top locked (schematic designator R300)
R300_U_RcMPPT-BMS-BFE-1-4 "10R 1W" RESC6331X75N 32.131,22.86 r180 top locked (schematic designator R300)
R300_U_RcMPPT-BMS-BFE-1-5 "10R 1W" RESC6331X75N 24.384,25.4 r180 top locked (schematic designator R300)
R300_U_RcMPPT-BMS-BFE-1-6 "10R 1W" RESC6331X75N 32.131,27.94 r180 top locked (schematic designator R300)
R300_U_RcMPPT-BMS-BFE-2-1 "10R 1W" RESC6331X75N 24.384,30.48 r180 top locked (schematic designator R300)
R300_U_RcMPPT-BMS-BFE-2-2 "10R 1W" RESC6331X75N 32.131,33.02 r180 top locked (schematic designator R300)
R300_U_RcMPPT-BMS-BFE-2-3 "10R 1W" RESC6331X75N 24.384,35.56 r180 top locked (schematic designator R300)
R300_U_RcMPPT-BMS-BFE-2-4 "10R 1W" RESC6331X75N 32.131,38.1 r180 top locked (schematic designator R300)
R300_U_RcMPPT-BMS-BFE-2-5 "10R 1W" RESC6331X75N 24.384,40.64 r180 top locked (schematic designator R300)
R300_U_RcMPPT-BMS-BFE-2-6 "10R 1W" RESC6331X75N 32.131,43.18 r180 top locked (schematic designator R300)
R301_U_RcMPPT-BMS-BFE-1-1 "1M" RESC1005X40N 40.132,15.24 r90 top locked (schematic designator R301)
R301_U_RcMPPT-BMS-BFE-1-2 "1M" RESC1005X40N 46.482,17.78 r90 top locked (schematic designator R301)
R301_U_RcMPPT-BMS-BFE-1-3 "1M" RESC1005X40N 40.132,20.32 r90 top locked (schematic designator R301)
R301_U_RcMPPT-BMS-BFE-1-4 "1M" RESC1005X40N 46.482,22.86 r90 top locked (schematic designator R301)
R301_U_RcMPPT-BMS-BFE-1-5 "1M" RESC1005X40N 40.132,25.4 r90 top locked (schematic designator R301)
R301_U_RcMPPT-BMS-BFE-1-6 "1M" RESC1005X40N 46.482,27.94 r90 top locked (schematic designator R301)
R301_U_RcMPPT-BMS-BFE-2-1 "1M" RESC1005X40N 40.132,30.48 r90 top locked (schematic designator R301)
R301_U_RcMPPT-BMS-BFE-2-2 "1M" RESC1005X40N 46.482,33.02 r90 top locked (schematic designator R301)
R301_U_RcMPPT-BMS-BFE-2-3 "1M" RESC1005X40N 40.132,35.56 r90 top locked (schematic designator R301)
R301_U_RcMPPT-BMS-BFE-2-4 "1M" RESC1005X40N 46.482,38.1 r90 top locked (schematic designator R301)
R301_U_RcMPPT-BMS-BFE-2-5 "1M" RESC1005X40N 40.132,40.64 r90 top locked (schematic designator R301)
R301_U_RcMPPT-BMS-BFE-2-6 "1M" RESC1005X40N 46.482,43.18 r90 top locked (schematic designator R301)
R400 "100R" RESC1005X40N 82.55,6.604 r270 top locked
R401 "100R" RESC1005X40N 81.28,6.604 r270 top locked
R402 "100R" RESC1005X40N 80.01,6.604 r270 top locked
R403 "100R" RESC1005X40N 78.74,6.604 r270 top locked
R404 "100R" RESC1005X40N 86.36,6.604 r270 top locked
R405 "100R" RESC1005X40N 87.63,6.604 r270 top locked
R406 "100R" RESC1005X40N 88.9,6.604 r270 top locked
R407 "100R" RESC1005X40N 90.17,6.604 r270 top locked
R408 "0R" RESC1005X40N 73.66,2.54 r270 top
R409 "0R" RESC1005X40N 76.2,2.54 r270 top
RT100 "10k 1% NTC" THRMC1608X90N 67.691,6.604 r0 top
RT101 "10k 1% NTC" THRMC1608X90N 27.432,10.414 r180 top
RT200 "10k 1% NTC" THRMC1608X90N 29.083,46.736 r180 top
RT201 "10k 1% NTC" THRMC1608X90N 62.484,48.387 r180 top

## Footprints (in the part's own frame and the unit in brackets; to place one, negate y for a bottom-side part, rotate by r counter-clockwise, add the part's x,y. Pads: shape width x height; smd on the part's side, far side on the other; paste and mask are expansions set on the pad)
CAPC1608X97N [mm]
  rect 0.54x0.94 smd: 1(-0.8,0) 2(0.8,0)
  silkscreen extent 0,-0.3 0,0.3, body extent -0.8,-0.4 0.8,0.4, height 0.9
CHIPLED_0603 [mm]
  rect 0.8x0.8 smd: 1(-0.75,0) 2(0.75,0)
  silkscreen extent -1.52,-0.76 -1.47,-0.76, body extent -0.8,-0.4 0.8,0.4, height 0.5
HDRRA13W66P0X254_1X13_3302X229X249P [mm]
  rect 1.725x1.725 hole 1.15: 1(0,0)
  round 1.725 hole 1.15: 2(2.54,0) 3(5.08,0) 4(7.62,0) 5(10.16,0) 6(12.7,0) 7(15.24,0) 8(17.78,0) 9(20.32,0) 10(22.86,0) 11(25.4,0) 12(27.94,0) 13(30.48,0)
  body extent -1.27,-0.33 31.75,12.68, height 2.49
QFP50P1200X1200X120-65N [mm]
  rect 1.475x0.3 smd: 1(-5.738,3.75) 2(-5.738,3.25) 3(-5.738,2.75) 4(-5.738,2.25) 5(-5.738,1.75) 6(-5.738,1.25) 7(-5.738,0.75) 8(-5.738,0.25) 9(-5.738,-0.25) 10(-5.738,-0.75) 11(-5.738,-1.25) 12(-5.738,-1.75) 13(-5.738,-2.25) 14(-5.738,-2.75) 15(-5.738,-3.25) 16(-5.738,-3.75) 33(5.738,-3.75) 34(5.738,-3.25) 35(5.738,-2.75) 36(5.738,-2.25) 37(5.738,-1.75) 38(5.738,-1.25) 39(5.738,-0.75) 40(5.738,-0.25) 41(5.738,0.25) 42(5.738,0.75) 43(5.738,1.25) 44(5.738,1.75) 45(5.738,2.25) 46(5.738,2.75) 47(5.738,3.25) 48(5.738,3.75)
  rect 0.3x1.475 smd: 17(-3.75,-5.738) 18(-3.25,-5.738) 19(-2.75,-5.738) 20(-2.25,-5.738) 21(-1.75,-5.738) 22(-1.25,-5.738) 23(-0.75,-5.738) 24(-0.25,-5.738) 25(0.25,-5.738) 26(0.75,-5.738) 27(1.25,-5.738) 28(1.75,-5.738) 29(2.25,-5.738) 30(2.75,-5.738) 31(3.25,-5.738) 32(3.75,-5.738) 49(3.75,5.738) 50(3.25,5.738) 51(2.75,5.738) 52(2.25,5.738) 53(1.75,5.738) 54(1.25,5.738) 55(0.75,5.738) 56(0.25,5.738) 57(-0.25,5.738) 58(-0.75,5.738) 59(-1.25,5.738) 60(-1.75,5.738) 61(-2.25,5.738) 62(-2.75,5.738) 63(-3.25,5.738) 64(-3.75,5.738)
  rect 6.5x6.5 smd paste-1 mask-1: 65(0,0)
  silkscreen extent -6.35,4.38 -6.1,4.62, body extent -6.02,-6.02 6.02,6.02, height 1.1
RESC1005X40N [mm]
  rect 0.6x0.7 smd: 1(-0.5,0) 2(0.5,0)
  body extent -0.5,-0.25 0.5,0.25, height 0.4
RESC1608X50N [mm]
  rect 0.85x1 smd: 1(-0.75,0) 2(0.75,0)
  body extent -0.79,-0.43 0.79,0.43, height 0.5
RESC6331X75N [mm]
  rect 1.25x3.3 smd: 1(-3,0) 2(3,0)
  silkscreen extent 0,-1.45 0,1.45, body extent -3.15,-1.55 3.15,1.55, height 0.75
SAMTEC_SMS-110-X-X-S [mm]
  rect 1.04x1.2 hole 0.77: 01(-5.715,0)
  oval 1.04x1.2 hole 0.77: 02(-4.445,0) 03(-3.175,0) 04(-1.905,0) 05(-0.635,0) 06(0.635,0) 07(1.905,0) 08(3.175,0) 09(4.445,0) 10(5.715,0)
  silkscreen extent -6.47,-1.53 6.47,1.53, body extent -6.46,-1.52 6.46,1.52, height 8.56
SOD-123FL [mm]
  rect 1.26x1.17 smd: 1(-1.525,0) 2(1.525,0)
  silkscreen extent -2.15,-0.86 1.38,0.86, body extent -1.8,-0.86 1.8,0.86, height 1.08
SOD-323 [mm]
  rect 1.05x0.5 smd: 1(-1.138,0) 2(1.138,0)
  silkscreen extent -1.66,-0.65 0.87,0.65, body extent -1.25,-0.65 1.25,0.65, height 1.1
SOT23-6 [mm]
  rect 1.15x0.6 smd: 1(-1.3,0.95) 2(-1.3,0) 3(-1.3,-0.95) 4(1.3,-0.95) 5(1.3,0) 6(1.3,0.95)
  silkscreen extent -2.01,-1.45 0,1.65, body extent -1.35,-1.45 1.35,1.45, height 1.45
SOT96P240X110-3N [mm]
  rect 1.1x0.65 smd: 1(-1.05,0.96) 2(-1.05,-0.96) 3(1.05,0)
  silkscreen extent -1.6,-1.45 0.15,1.54, body extent -1.2,-1.45 1.2,1.45, height 1.1
THRMC1608X90N [mm]
  rect 0.9x0.95 smd: 1(-0.8,0) 2(0.8,0)
  silkscreen extent 0,-0.3 0,0.3, body extent -0.8,-0.4 0.8,0.4, height 0.9
UQFN-12 [mm]
  rect 0.2x0.6 smd: 1(-0.8,-0.65) 2(-0.4,-0.65) 3(0,-0.65) 4(0.4,-0.65) 5(0.8,-0.65) 7(0.8,0.65) 8(0.4,0.65) 9(0,0.65) 10(-0.4,0.65) 11(-0.8,0.65)
  rect 0.6x0.2 smd: 6(0.8,0) 12(-0.8,0)
  rect 0.2x0.15 smd: 13(-1,-0.425)
  silkscreen extent -1.21,-1.19 -1.11,-1.09, body extent -1,-0.85 1,0.85, height 0.55

## Part data
C1 C100 C101 C102 C103 C104 C105 C106 C107 C108 C109 C110 C111 C112 C113 C114 C115 C116 C200 C201 C202 C203 C204 C205 C206 C207 C208 C209 C210 C211 C212 C213 C214 C215 C216 C300_U_RcMPPT-BMS-BFE-1-1 C300_U_RcMPPT-BMS-BFE-1-2 C300_U_RcMPPT-BMS-BFE-1-3 C300_U_RcMPPT-BMS-BFE-1-4 C300_U_RcMPPT-BMS-BFE-1-5 C300_U_RcMPPT-BMS-BFE-1-6 C300_U_RcMPPT-BMS-BFE-2-1 C300_U_RcMPPT-BMS-BFE-2-2 C300_U_RcMPPT-BMS-BFE-2-3 C300_U_RcMPPT-BMS-BFE-2-4 C300_U_RcMPPT-BMS-BFE-2-5 C300_U_RcMPPT-BMS-BFE-2-6 C400 C401: library part C0603, "Capacitor", Height=0.97
D300_U_RcMPPT-BMS-BFE-1-1 D300_U_RcMPPT-BMS-BFE-1-2 D300_U_RcMPPT-BMS-BFE-1-3 D300_U_RcMPPT-BMS-BFE-1-4 D300_U_RcMPPT-BMS-BFE-1-5 D300_U_RcMPPT-BMS-BFE-1-6 D300_U_RcMPPT-BMS-BFE-2-1 D300_U_RcMPPT-BMS-BFE-2-2 D300_U_RcMPPT-BMS-BFE-2-3 D300_U_RcMPPT-BMS-BFE-2-4 D300_U_RcMPPT-BMS-BFE-2-5 D300_U_RcMPPT-BMS-BFE-2-6 D301_U_RcMPPT-BMS-BFE-1-1 D301_U_RcMPPT-BMS-BFE-1-2 D301_U_RcMPPT-BMS-BFE-1-3 D301_U_RcMPPT-BMS-BFE-1-4 D301_U_RcMPPT-BMS-BFE-1-5 D301_U_RcMPPT-BMS-BFE-1-6 D301_U_RcMPPT-BMS-BFE-2-1 D301_U_RcMPPT-BMS-BFE-2-2 D301_U_RcMPPT-BMS-BFE-2-3 D301_U_RcMPPT-BMS-BFE-2-4 D301_U_RcMPPT-BMS-BFE-2-5 D301_U_RcMPPT-BMS-BFE-2-6: library part ZENER-DIODE, "ZENER Diode"
D400 D401: "TVS Diode Array", Height=0.6mm
IC100 IC200: "Integrated Circuit", Manufacturer_Name="Texas Instruments", Mouser Part Number=595-BQ76PL536APAPT, Arrow Part Number=BQ76PL536APAPT, Arrow Price/Stock=https://www.arrow.com/en/products/bq76pl536apapt/texas-instruments?region=nac, Datasheet Link=http://www.ti.com/lit/gpn/bq76pl536a, Height=1.2mm, Manufacturer_Part_Number=BQ76PL536APAPT, Mouser Price/Stock=https://www.mouser.co.uk/ProductDetail/Texas-Instruments/BQ76PL536APAPT?qs=UlfnwZ2x8nT1EXA%252BD%252BEfIQ%3D%3D
IC400 IC401: "Integrated Circuit", Manufacturer_Name="Texas Instruments", Mouser Part Number=595-TXU0304RUTR, Datasheet Link=https://www.ti.com/lit/ds/symlink/txu0304.pdf?ts=1639746896730&ref_url=https%253A%252F%252Fwww.ti.com%252Fproduct%252FTXU0304, Manufacturer_Part_Number=TXU0304RUTR, Mouser Price/Stock=https://www.mouser.at/ProductDetail/Texas-Instruments/TXU0304RUTR?qs=pBJMDPsKWf1XxvxZVB4EQA%3D%3D
J1: "Connector", Manufacturer_Name=Molex, Mouser Part Number=538-22-28-8133, Datasheet Link=https://www.molex.com/pdm_docs/sd/022288133_sd.pdf, Height=2.49mm, Manufacturer_Part_Number=22-28-8133, Mouser Price/Stock=https://www.mouser.co.uk/ProductDetail/Molex/22-28-8133?qs=l%252BWx29wYPrwPQBTZUVDqKw%3D%3D
J400 J401 J402 J403: library part SMS-110-X-X-S, "10 Position Receptacle Connector 0.050\" (1.27mm) Through Hole Gold", Package=None, Availability=Unavailable, MF="{'manufacturer': u'Samtec'}", MP=SMS-110-X-X-S, Price=None
LED100 LED200: library part CHIPLED0603, "LED", Mouser Price/Stock=https://www.mouser.at/c/optoelectronics/led-lighting/led-emitters/standard-leds-smd/?series=CHIPLED%200603&instock=y
Q100 Q200 Q300_U_RcMPPT-BMS-BFE-1-1 Q300_U_RcMPPT-BMS-BFE-1-2 Q300_U_RcMPPT-BMS-BFE-1-3 Q300_U_RcMPPT-BMS-BFE-1-4 Q300_U_RcMPPT-BMS-BFE-1-5 Q300_U_RcMPPT-BMS-BFE-1-6 Q300_U_RcMPPT-BMS-BFE-2-1 Q300_U_RcMPPT-BMS-BFE-2-2 Q300_U_RcMPPT-BMS-BFE-2-3 Q300_U_RcMPPT-BMS-BFE-2-4 Q300_U_RcMPPT-BMS-BFE-2-5 Q300_U_RcMPPT-BMS-BFE-2-6: library part NMOS, "MOSFET (N-Channel)"
R1 R2 R3 R4 R5 R6 R7 R8 R100 R101 R102 R103 R104 R105 R106 R107 R108 R109 R110 R111 R112 R113 R114 R116 R117 R118 R119 R120 R200 R201 R202 R203 R204 R205 R206 R207 R208 R209 R210 R211 R212 R215 R216 R218 R220 R221 R222 R223 R301_U_RcMPPT-BMS-BFE-1-1 R301_U_RcMPPT-BMS-BFE-1-2 R301_U_RcMPPT-BMS-BFE-1-3 R301_U_RcMPPT-BMS-BFE-1-4 R301_U_RcMPPT-BMS-BFE-1-5 R301_U_RcMPPT-BMS-BFE-1-6 R301_U_RcMPPT-BMS-BFE-2-1 R301_U_RcMPPT-BMS-BFE-2-2 R301_U_RcMPPT-BMS-BFE-2-3 R301_U_RcMPPT-BMS-BFE-2-4 R301_U_RcMPPT-BMS-BFE-2-5 R301_U_RcMPPT-BMS-BFE-2-6 R400 R401 R402 R403 R404 R405 R406 R407 R408 R409: library part R0402, "Resistor", Height=0.4mm
R121 R122 R123 R124 R213 R214 R217 R219: library part R0603, "Resistor", Height=0.55mm
R300_U_RcMPPT-BMS-BFE-1-1 R300_U_RcMPPT-BMS-BFE-1-2 R300_U_RcMPPT-BMS-BFE-1-3 R300_U_RcMPPT-BMS-BFE-1-4 R300_U_RcMPPT-BMS-BFE-1-5 R300_U_RcMPPT-BMS-BFE-1-6 R300_U_RcMPPT-BMS-BFE-2-1 R300_U_RcMPPT-BMS-BFE-2-2 R300_U_RcMPPT-BMS-BFE-2-3 R300_U_RcMPPT-BMS-BFE-2-4 R300_U_RcMPPT-BMS-BFE-2-5 R300_U_RcMPPT-BMS-BFE-2-6: library part R2512, "Resistor", Height=0.75mm
RT100 RT101 RT200 RT201: library part ERT-J1VG103FA, "Thermistor", Manufacturer_Name=Panasonic, Mouser Part Number=667-ERT-J1VG103FA, Arrow Part Number=ERT-J1VG103FA, Arrow Price/Stock=https://www.arrow.com/en/products/ert-j1vg103fa/panasonic, Datasheet Link=https://componentsearchengine.com/Datasheets/1/ERT-J1VG103FA.pdf, Height=0.9mm, Manufacturer_Part_Number=ERT-J1VG103FA, Mouser Price/Stock=https://www.mouser.co.uk/ProductDetail/Panasonic/ERT-J1VG103FA?qs=Tap6ps20mlMpYFuAQ7bHkg%3D%3D

## Free pads (board coordinates)
  round 6 hole 3.4: 2(3.81,3.81) 2(3.81,52.07) 2(95.25,3.81) 2(95.25,52.07)

## Via types
v1: diameter 0.6, hole 0.3, Top Layer to Bottom Layer, tented both sides, 127 vias
v2: diameter 0.85, hole 0.45, Top Layer to Bottom Layer, tented both sides, 31 vias

## Nets (pads, with @x,y where several pads share a name; then routed paths per layer and width w, separated by ;. In a path a pad name is that pad's centre, name@x,y a point inside that pad or via, vN(x,y) a via of type N, cw(c..) or ccw(c..) an arc to the next point about the centre after c; other vN are vias at no path point)
3V3-IO: C401.2 D400.5 D401.5 IC400.1 IC400.12 IC400.13 IC401.11 IC401.12 J401.06 | length 9.5
  Top Layer w0.2: IC401.11@81.445,12.685 81.445,12.573 v1(82.423,12.573) ; IC401.12@81.445,13.335 82.169,13.335 82.423,13.081 v1(82.423,12.573) ; IC400.1@87.465,12.685 87.465,12.573 v1(86.487,12.573) ; IC400.12@87.465,13.335 86.614,13.335 86.487,13.208 v1(86.487,12.573) ; v1(82.423,12.573) C401.2@84.455,12.573 v1(86.487,12.573)
  other v1: 79.345,9.398 86.965,9.398
5V-IO: J402.01 J402.02 R408.2 | length 82.3
  Top Layer w0.3: v1(73.66,1.143) R408.2@73.66,2.04
  Bottom Layer w0.6: v1(73.66,1.143) 74.676,1.143 75.057,1.524 75.057,5.588 76.073,6.604 90.551,6.604 93.495,9.548 93.495,47.475 91.186,49.784 80.361,49.784 80.01,50.135 J402.02@80.01,52.07 J402.01@78.74,52.07
5V-LS: C400.2 IC400.11 IC401.1 IC401.13 R408.1 R409.1 | length 8
  Top Layer w0.2: IC401.1@81.445,13.985 81.445,14.097 v1(82.423,14.097) C400.2@84.455,14.097 v1(86.487,14.097) 87.465,14.097 IC400.11@87.465,13.985
  Top Layer w0.3: R408.1@73.66,3.04 v1(73.66,3.937) ; R409.1@76.2,3.04 v1(76.2,3.937)
A-VREF_2: C109.2 IC100.16 | length 1.6
  Top Layer w0.3: C109.2@58.674,14.008 58.696,14.03 IC100.16@60.302,14.03
A-VREF_3: C209.2 IC200.16 | length 1.7
  Top Layer w0.3: C209.2@58.674,34.201 58.681,34.194 59.285,34.194 59.441,34.35 IC200.16@60.302,34.35
ALERT-IO_5: J401.03 R401.2 | length 2.3
  Top Layer w0.2: J401.03@81.28,3.81 R401.2@81.28,6.104
CONV-IO_5: J401.01 R403.2 | length 2.3
  Top Layer w0.2: J401.01@78.74,3.81 R403.2@78.74,6.104
CS-IO_5: J401.10 R405.2 | length 4.7
  Top Layer w0.2: v1(87.63,5.08) R405.2@87.63,6.104
  Bottom Layer w0.2: v1(87.63,5.08) 89.916,5.08 90.17,4.826 J401.10@90.17,3.81
DRDY-IO_5: J401.02 R402.2 | length 2.3
  Top Layer w0.2: J401.02@80.01,3.81 R402.2@80.01,6.104
FAULT-IO_5: J401.04 R400.2 | length 2.3
  Top Layer w0.3: J401.04@82.55,3.81 R400.2@82.55,6.104
GPAI+_2: IC100.48 R120.1 | length 2.8
  Top Layer w0.3: IC100.48@71.778,21.53 72.965,21.53 73.279,21.844 R120.1@73.279,22.995
GPAI+_3: IC200.48 R211.1 | length 2.7
  Top Layer w0.3: IC200.48@71.778,41.85 72.838,41.85 73.279,42.291 R211.1@73.279,43.307
GPAI-_2: IC100.47 R119.1 | length 4.2
  Top Layer w0.3: IC100.47@71.778,21.03 73.862,21.03 74.295,21.463 R119.1@74.295,22.995
GPAI-_3: IC200.47 R210.1 | length 3.9
  Top Layer w0.3: IC200.47@71.778,41.35 73.354,41.35 74.295,42.291 R210.1@74.295,43.307
GPIO-LED_2: IC100.45 R118.2 | length 13.7
  Top Layer w0.2: IC100.45@71.778,20.03 82.768,20.03 83.058,20.32 R118.2@85.352,20.32
GPIO-LED_3: IC200.45 R204.2 | length 13.7
  Top Layer w0.2: IC200.45@71.778,40.35 81.371,40.35 81.661,40.64 R204.2@85.352,40.64
H-SELECT_2: IC100.44 R113.1 R114.1 | length 29.6
  Top Layer w0.2: IC100.44@71.778,19.53 85.499,19.53 86.741,18.288 89.027,18.288 94.615,12.7 R113.1@96.02,12.7 R114.1@96.02,10.16
H-SELECT_3: IC200.44 R201.1 R203.1 | length 29.6
  Top Layer w0.2: IC200.44@71.778,39.85 83.975,39.85 90.805,33.02 R201.1@96.02,33.02 R203.1@96.02,30.48
LDO5V1: C108.2 C114.2 C115.2 C116.2 IC100.32 R116.2 R117.2 R409.2 RT100.2 RT101.2 | length 95.4
  Top Layer w0.3: RT101.2@26.651,10.433 v1@26.651,11.792 ; v1(26.67,11.811) C116.2@28.156,11.811 ; RT100.2@68.491,6.604 68.237,6.858 C115.2@68.237,8.128 68.237,9.817 68.856,10.436 C114.2@69.79,10.436 ; IC100.32@69.79,12.042 IC100.32@69.79,11.938 ; v1(71.374,11.938) IC100.32@69.79,11.938 ; R409.2@76.2,2.04 75.43,2.04 74.93,2.54 74.93,4.572 72.962,6.54 71.564,6.54 69.812,8.293 C108.2@69.812,9.144 C114.2@69.812,10.414 C114.2@69.79,10.436 ; v1(84.328,21.336) R117.2@85.352,21.336 ; v1(87.503,22.86) R116.2@88.4,22.86 ; C114.2@69.79,10.436 IC100.32@69.79,11.938
  Top Layer w0.5: RT101.2@26.632,10.414 RT101.2@26.651,10.433 ; v1@26.651,11.792 v1(26.67,11.811)
  Bottom Layer w0.5: v1(26.67,11.811) 28.575,9.906 55.626,9.906 58.42,7.112 66.548,7.112 v1(71.374,11.938) 74.93,11.938 v1(84.328,21.336) 84.328,22.352 84.836,22.86 v1(87.503,22.86)
LDO5V2: C203.2 C204.2 C214.2 C215.2 IC200.32 R200.2 R202.2 RT200.2 RT201.2 | length 91
  Top Layer w0.3: RT200.2@28.283,46.736 28.321,46.774 v1(28.321,48.133) C203.2@29.807,48.133 ; v1(60.452,48.387) RT201.2@61.684,48.387 C204.2@61.684,46.99 ; v1(69.723,30.861) 70.454,30.861 70.574,30.741 C215.2@70.574,30.734 C214.2@70.574,29.464 ; IC200.32@69.79,32.362 69.79,32.131 70.493,32.131 ; C215.2@70.582,30.742 70.582,32.041 70.493,32.131 ; v1(73.025,32.131) 70.493,32.131 ; v1(84.328,41.656) R202.2@85.352,41.656 ; v1(87.503,43.18) R200.2@88.4,43.18
  Bottom Layer w0.3: v1(28.321,48.133) 28.393,48.133 29.282,49.022 59.817,49.022 v1(60.452,48.387) 62.738,48.387 69.723,41.402 v1(69.723,30.861)
  Bottom Layer w0.5: v1(73.025,32.131) 77.216,32.131 84.328,39.243 v1(84.328,41.656) 84.347,41.675 84.347,42.654 84.874,43.18 v1(87.503,43.18)
LDOA1: C110.2 C111.2 IC100.17 R113.2 | length 53.3
  Top Layer w0.3: C111.2@61.252,9.144 C110.2@61.252,10.414 61.341,10.503 61.341,11.176 61.619,11.454 62.29,11.454 IC100.17@62.29,12.042 62.29,13.148 v1(61.849,13.589) ; R113.2@97.02,12.7 v1(97.917,12.7)
  Mid Layer 2 w0.3: v1(61.849,13.589) 64.134,11.304 68.465,11.304 70.485,13.325 70.485,19.177 71.12,19.812 85.217,19.812 86.741,18.288 89.027,18.288 94.615,12.7 v1(97.917,12.7)
LDOA2: C210.2 C211.2 IC200.17 R201.2 | length 45.4
  Top Layer w0.3: v1(60.452,28.321) 60.471,28.34 60.471,29.445 C211.2@60.49,29.464 C210.2@60.49,30.734 60.49,30.934 61.33,31.774 62.29,31.774 IC200.17@62.29,32.362 ; R201.2@97.02,33.02 v1(97.79,33.02)
  Mid Layer 2 w0.3: v1(60.452,28.321) 61.137,28.321 63.931,31.115 68.58,31.115 70.485,33.02 v1(97.79,33.02)
LDOD1: C112.2 C113.2 IC100.18 IC100.46 | length 29.3
  Top Layer w0.3: C112.2@62.357,10.579 62.557,10.579 62.677,10.699 62.677,10.988 62.79,11.101 IC100.18@62.79,12.042 62.79,13.133 v1(63.246,13.589) ; IC100.46@71.778,20.53 74.124,20.53 74.257,20.663 C113.2@75.438,20.663 75.457,20.682 76.562,20.682 v1(76.581,20.701)
  Mid Layer 2 w0.6: v1(63.246,13.589) 64.747,12.088 68.095,12.088 69.723,13.716 69.723,19.558 70.866,20.701 v1(76.581,20.701)
LDOD2: C212.2 C213.2 IC200.18 IC200.46 | length 30.6
  Top Layer w0.3: C213.2@61.595,29.756 v1(61.595,30.734) 62.484,30.734 62.79,31.04 IC200.18@62.79,32.362 ; IC200.46@71.778,40.85 73.739,40.85 73.745,40.856 C212.2@75.438,40.856 ; C212.2@75.438,40.983 75.457,41.002 76.435,41.002 v1(76.454,41.021)
  Mid Layer 2 w0.6: v1(61.595,30.734) 63.5,32.639 68.072,32.639 70.104,34.671 70.104,40.132 70.993,41.021 v1(76.454,41.021)
NetC100_2: C100.2 IC100.1 R100.2 | length 13.2
  Top Layer w0.3: R100.2@53.34,29.21 55.753,29.21 57.658,27.305 57.658,22.606 57.912,22.352 58.509,22.352 C100.2@58.547,22.314 58.547,21.844 58.861,21.53 IC100.1@60.302,21.53
NetC101_2: C101.2 IC100.3 R102.2 | length 15.2
  Top Layer w0.2: C101.2@52.032,27.432 52.032,26.708 52.197,26.543 56.642,26.543 56.896,26.289 56.896,22.098 58.464,20.53 IC100.3@60.302,20.53
  Top Layer w0.3: R102.2@50.792,27.432 C101.2@52.032,27.432
NetC102_2: C102.2 IC100.5 R104.2 | length 13.4
  Top Layer w0.2: C102.2@52.032,24.892 52.032,24.168 52.197,24.003 55.88,24.003 56.134,23.749 56.134,21.59 58.194,19.53 IC100.5@60.302,19.53
  Top Layer w0.3: R104.2@50.792,24.892 C102.2@52.032,24.892
NetC103_2: C103.2 IC100.7 R106.2 | length 11.5
  Top Layer w0.2: C103.2@52.032,22.352 52.032,21.628 52.197,21.463 54.991,21.463 57.924,18.53 IC100.7@60.302,18.53
  Top Layer w0.3: R106.2@50.792,22.352 C103.2@52.032,22.352
NetC104_2: C104.2 IC100.9 R108.2 | length 10.9
  Top Layer w0.2: C104.2@52.032,19.812 52.032,19.088 52.197,18.923 56.261,18.923 57.654,17.53 IC100.9@60.302,17.53
  Top Layer w0.3: R108.2@50.792,19.812 C104.2@52.032,19.812
NetC105_2: C105.2 IC100.11 R110.2 | length 10.4
  Top Layer w0.2: C105.2@52.032,17.272 52.032,16.548 52.197,16.383 57.404,16.383 57.531,16.51 60.282,16.51 IC100.11@60.302,16.53
  Top Layer w0.3: R110.2@50.792,17.272 C105.2@52.032,17.272
NetC106_2: C106.2 IC100.13 R112.2 | length 11
  Top Layer w0.2: C106.2@52.032,14.732 52.032,14.008 52.197,13.843 56.134,13.843 57.821,15.53 IC100.13@60.302,15.53
  Top Layer w0.3: R112.2@50.792,14.732 C106.2@52.032,14.732
NetC200_2: C200.2 C300_U_RcMPPT-BMS-BFE-2-6.2 D300_U_RcMPPT-BMS-BFE-2-6.1 IC200.52 IC200.53 IC200.54 IC200.55 IC200.56 IC200.57 IC200.58 IC200.59 IC200.63 IC200.64 J1.13 R205.1 R300_U_RcMPPT-BMS-BFE-2-6.2 | length 74.8
  Top Layer w0.3: v1(40.64,44.323) 41.656,44.323 42.676,45.343 49.661,45.343 R205.1@49.792,45.212 ; C200.2@61.379,45.466 v1(62.484,45.466) 62.484,44.958 ; IC200.64@62.29,43.838 62.29,44.764 62.484,44.958 ; IC200.63@62.79,43.838 62.79,44.652 62.484,44.958 ; IC200.59@64.79,43.838 IC200.58@65.29,43.838 IC200.57@65.79,43.838 IC200.56@66.29,43.838 IC200.55@66.79,43.838 IC200.54@67.29,43.838 ; v1(67.183,45.466) 67.29,45.359 IC200.54@67.29,43.838 ; IC200.52@68.29,43.838 IC200.53@67.79,43.838 IC200.54@67.29,43.838
  Mid Layer 2 w0.3: v1(62.484,45.466) v1(67.183,45.466)
  Mid Layer 2 w0.6: J1.13@12.7,43.18 34.925,43.18 37.846,46.101 61.849,46.101 v1(62.484,45.466)
NetC201_2: C201.2 IC200.1 R205.2 | length 11.1
  Top Layer w0.3: R205.2@50.792,45.212 55.118,45.212 57.696,42.634 C201.2@58.547,42.634 58.547,42.214 58.911,41.85 IC200.1@60.302,41.85
NetC202_2: C202.2 IC200.3 R207.2 | length 11.4
  Top Layer w0.2: C202.2@52.032,42.672 52.032,43.396 52.197,43.561 54.864,43.561 57.575,40.85 IC200.3@60.302,40.85
  Top Layer w0.3: R207.2@50.792,42.672 C202.2@52.032,42.672
NetC205_2: C205.2 IC200.5 R209.2 | length 10.8
  Top Layer w0.2: C205.2@52.032,40.132 52.032,40.856 52.197,41.021 54.737,41.021 55.908,39.85 IC200.5@60.302,39.85
  Top Layer w0.3: R209.2@50.792,40.132 C205.2@52.032,40.132
NetC206_2: C206.2 IC200.7 R215.2 | length 10.5
  Top Layer w0.2: C206.2@52.032,37.592 52.032,38.316 52.197,38.481 57.15,38.481 57.519,38.85 IC200.7@60.302,38.85
  Top Layer w0.3: R215.2@50.792,37.592 C206.2@52.032,37.592
NetC207_2: C207.2 IC200.9 R218.2 | length 11.1
  Top Layer w0.2: C207.2@52.032,35.052 52.032,35.776 52.197,35.941 55.88,35.941 57.789,37.85 IC200.9@60.302,37.85
  Top Layer w0.3: R218.2@50.792,35.052 C207.2@52.032,35.052
NetC208_2: C208.2 IC200.11 R221.2 | length 11.7
  Top Layer w0.2: C208.2@52.032,32.512 52.032,33.236 52.197,33.401 54.61,33.401 58.059,36.85 IC200.11@60.302,36.85
  Top Layer w0.3: R221.2@50.792,32.512 C208.2@52.032,32.512
NetC216_2: C216.2 IC200.13 R223.2 | length 13.5
  Top Layer w0.2: R223.2@50.792,29.972 54.356,29.972 56.388,32.004 56.388,33.909 56.68,34.201 C216.2@57.404,34.201 57.404,34.925 58.329,35.85 IC200.13@60.302,35.85
NetC300_U_RcMPPT-BMS-BFE-1-2_1: C300_U_RcMPPT-BMS-BFE-1-1.2 C300_U_RcMPPT-BMS-BFE-1-2.1 D300_U_RcMPPT-BMS-BFE-1-1.1 D300_U_RcMPPT-BMS-BFE-1-2.2 D301_U_RcMPPT-BMS-BFE-1-2.2 J1.2 Q300_U_RcMPPT-BMS-BFE-1-2.2 R110.1 R300_U_RcMPPT-BMS-BFE-1-1.2 R301_U_RcMPPT-BMS-BFE-1-2.1 | length 2.2
  Top Layer w0.3: D301_U_RcMPPT-BMS-BFE-1-2.2@47.879,16.642 48.519,16.642 49.149,17.272 R110.1@49.792,17.272
  other v1: 45.974,16.383 46.99,16.383
NetC300_U_RcMPPT-BMS-BFE-1-3_1: C300_U_RcMPPT-BMS-BFE-1-2.2 C300_U_RcMPPT-BMS-BFE-1-3.1 D300_U_RcMPPT-BMS-BFE-1-2.1 D300_U_RcMPPT-BMS-BFE-1-3.2 D301_U_RcMPPT-BMS-BFE-1-3.2 J1.3 Q300_U_RcMPPT-BMS-BFE-1-3.2 R108.1 R300_U_RcMPPT-BMS-BFE-1-2.2 R301_U_RcMPPT-BMS-BFE-1-3.1 | length 8.7
  Top Layer w0.3: D301_U_RcMPPT-BMS-BFE-1-3.2@41.529,19.182 42.169,19.182 42.951,19.964 49.642,19.964 49.792,19.814 R108.1@49.792,19.812
  other v1: 39.624,18.923 40.64,18.923
NetC300_U_RcMPPT-BMS-BFE-1-4_1: C300_U_RcMPPT-BMS-BFE-1-3.2 C300_U_RcMPPT-BMS-BFE-1-4.1 D300_U_RcMPPT-BMS-BFE-1-3.1 D300_U_RcMPPT-BMS-BFE-1-4.2 D301_U_RcMPPT-BMS-BFE-1-4.2 J1.4 Q300_U_RcMPPT-BMS-BFE-1-4.2 R106.1 R300_U_RcMPPT-BMS-BFE-1-3.2 R301_U_RcMPPT-BMS-BFE-1-4.1 | length 2.2
  Top Layer w0.3: D301_U_RcMPPT-BMS-BFE-1-4.2@47.879,21.722 48.519,21.722 49.149,22.352 R106.1@49.792,22.352
  other v1: 45.974,22.112 46.99,22.112
NetC300_U_RcMPPT-BMS-BFE-1-5_1: C300_U_RcMPPT-BMS-BFE-1-4.2 C300_U_RcMPPT-BMS-BFE-1-5.1 D300_U_RcMPPT-BMS-BFE-1-4.1 D300_U_RcMPPT-BMS-BFE-1-5.2 D301_U_RcMPPT-BMS-BFE-1-5.2 J1.5 Q300_U_RcMPPT-BMS-BFE-1-5.2 R104.1 R300_U_RcMPPT-BMS-BFE-1-4.2 R301_U_RcMPPT-BMS-BFE-1-5.1 | length 8.7
  Top Layer w0.3: D301_U_RcMPPT-BMS-BFE-1-5.2@41.529,24.262 42.169,24.262 42.951,25.044 49.642,25.044 49.792,24.894 R104.1@49.792,24.892
  other v1: 39.624,24.003 40.64,24.003
NetC300_U_RcMPPT-BMS-BFE-1-6_1: C300_U_RcMPPT-BMS-BFE-1-5.2 C300_U_RcMPPT-BMS-BFE-1-6.1 D300_U_RcMPPT-BMS-BFE-1-5.1 D300_U_RcMPPT-BMS-BFE-1-6.2 D301_U_RcMPPT-BMS-BFE-1-6.2 J1.6 Q300_U_RcMPPT-BMS-BFE-1-6.2 R102.1 R300_U_RcMPPT-BMS-BFE-1-5.2 R301_U_RcMPPT-BMS-BFE-1-6.1 | length 2.2
  Top Layer w0.3: D301_U_RcMPPT-BMS-BFE-1-6.2@47.879,26.802 48.519,26.802 49.149,27.432 R102.1@49.792,27.432
  other v1: 45.974,26.762 46.99,26.762
NetC300_U_RcMPPT-BMS-BFE-2-2_1: C300_U_RcMPPT-BMS-BFE-2-1.2 C300_U_RcMPPT-BMS-BFE-2-2.1 D300_U_RcMPPT-BMS-BFE-2-1.1 D300_U_RcMPPT-BMS-BFE-2-2.2 D301_U_RcMPPT-BMS-BFE-2-2.2 J1.8 Q300_U_RcMPPT-BMS-BFE-2-2.2 R221.1 R300_U_RcMPPT-BMS-BFE-2-1.2 R301_U_RcMPPT-BMS-BFE-2-2.1 | length 2.2
  Top Layer w0.3: D301_U_RcMPPT-BMS-BFE-2-2.2@47.879,31.882 48.519,31.882 49.149,32.512 R221.1@49.792,32.512
  other v1: 45.974,31.623 46.99,31.623
NetC300_U_RcMPPT-BMS-BFE-2-3_1: C300_U_RcMPPT-BMS-BFE-2-2.2 C300_U_RcMPPT-BMS-BFE-2-3.1 D300_U_RcMPPT-BMS-BFE-2-2.1 D300_U_RcMPPT-BMS-BFE-2-3.2 D301_U_RcMPPT-BMS-BFE-2-3.2 J1.9 Q300_U_RcMPPT-BMS-BFE-2-3.2 R218.1 R300_U_RcMPPT-BMS-BFE-2-2.2 R301_U_RcMPPT-BMS-BFE-2-3.1 | length 8.6
  Top Layer w0.3: D301_U_RcMPPT-BMS-BFE-2-3.2@41.529,34.422 42.169,34.422 42.943,35.196 49.648,35.196 R218.1@49.792,35.052
  other v1: 39.624,34.163 40.64,34.163
NetC300_U_RcMPPT-BMS-BFE-2-4_1: C300_U_RcMPPT-BMS-BFE-2-3.2 C300_U_RcMPPT-BMS-BFE-2-4.1 D300_U_RcMPPT-BMS-BFE-2-3.1 D300_U_RcMPPT-BMS-BFE-2-4.2 D301_U_RcMPPT-BMS-BFE-2-4.2 J1.10 Q300_U_RcMPPT-BMS-BFE-2-4.2 R215.1 R300_U_RcMPPT-BMS-BFE-2-3.2 R301_U_RcMPPT-BMS-BFE-2-4.1 | length 2.2
  Top Layer w0.3: D301_U_RcMPPT-BMS-BFE-2-4.2@47.879,36.962 48.519,36.962 49.149,37.592 R215.1@49.792,37.592
  other v1: 45.974,36.703 46.99,36.703
NetC300_U_RcMPPT-BMS-BFE-2-5_1: C300_U_RcMPPT-BMS-BFE-2-4.2 C300_U_RcMPPT-BMS-BFE-2-5.1 D300_U_RcMPPT-BMS-BFE-2-4.1 D300_U_RcMPPT-BMS-BFE-2-5.2 D301_U_RcMPPT-BMS-BFE-2-5.2 J1.11 Q300_U_RcMPPT-BMS-BFE-2-5.2 R209.1 R300_U_RcMPPT-BMS-BFE-2-4.2 R301_U_RcMPPT-BMS-BFE-2-5.1 | length 8.6
  Top Layer w0.3: D301_U_RcMPPT-BMS-BFE-2-5.2@41.529,39.502 42.169,39.502 42.925,40.258 49.666,40.258 R209.1@49.792,40.132
  other v1: 39.624,39.243 40.64,39.243
NetC300_U_RcMPPT-BMS-BFE-2-6_1: C300_U_RcMPPT-BMS-BFE-2-5.2 C300_U_RcMPPT-BMS-BFE-2-6.1 D300_U_RcMPPT-BMS-BFE-2-5.1 D300_U_RcMPPT-BMS-BFE-2-6.2 D301_U_RcMPPT-BMS-BFE-2-6.2 J1.12 Q300_U_RcMPPT-BMS-BFE-2-6.2 R207.1 R300_U_RcMPPT-BMS-BFE-2-5.2 R301_U_RcMPPT-BMS-BFE-2-6.1 | length 2.2
  Top Layer w0.3: D301_U_RcMPPT-BMS-BFE-2-6.2@47.879,42.042 48.519,42.042 49.149,42.672 R207.1@49.792,42.672
  other v1: 45.974,41.783 46.99,41.783